# Altium PCB 175-00024_rev3, Backplane, Instrument Crate.PcbDoc (part 1 of 4)
Units mil, origin at the board's own origin, x right, y up, seen from the top; angles counter-clockwise.
Board outline 8400 x 10183.07 mil, 8 copper layers (Top Layer (*.GTL), Mid-Layer 1 (*.G1), +3.3V (*.GP1), +24V (*.GP2), RTN (*.GP3), +12V (*.GP4), Signal GND (*.GP5), Bottom Layer (*.GBL)); 240 components, 169 nets, 1580 pads, 490 vias.
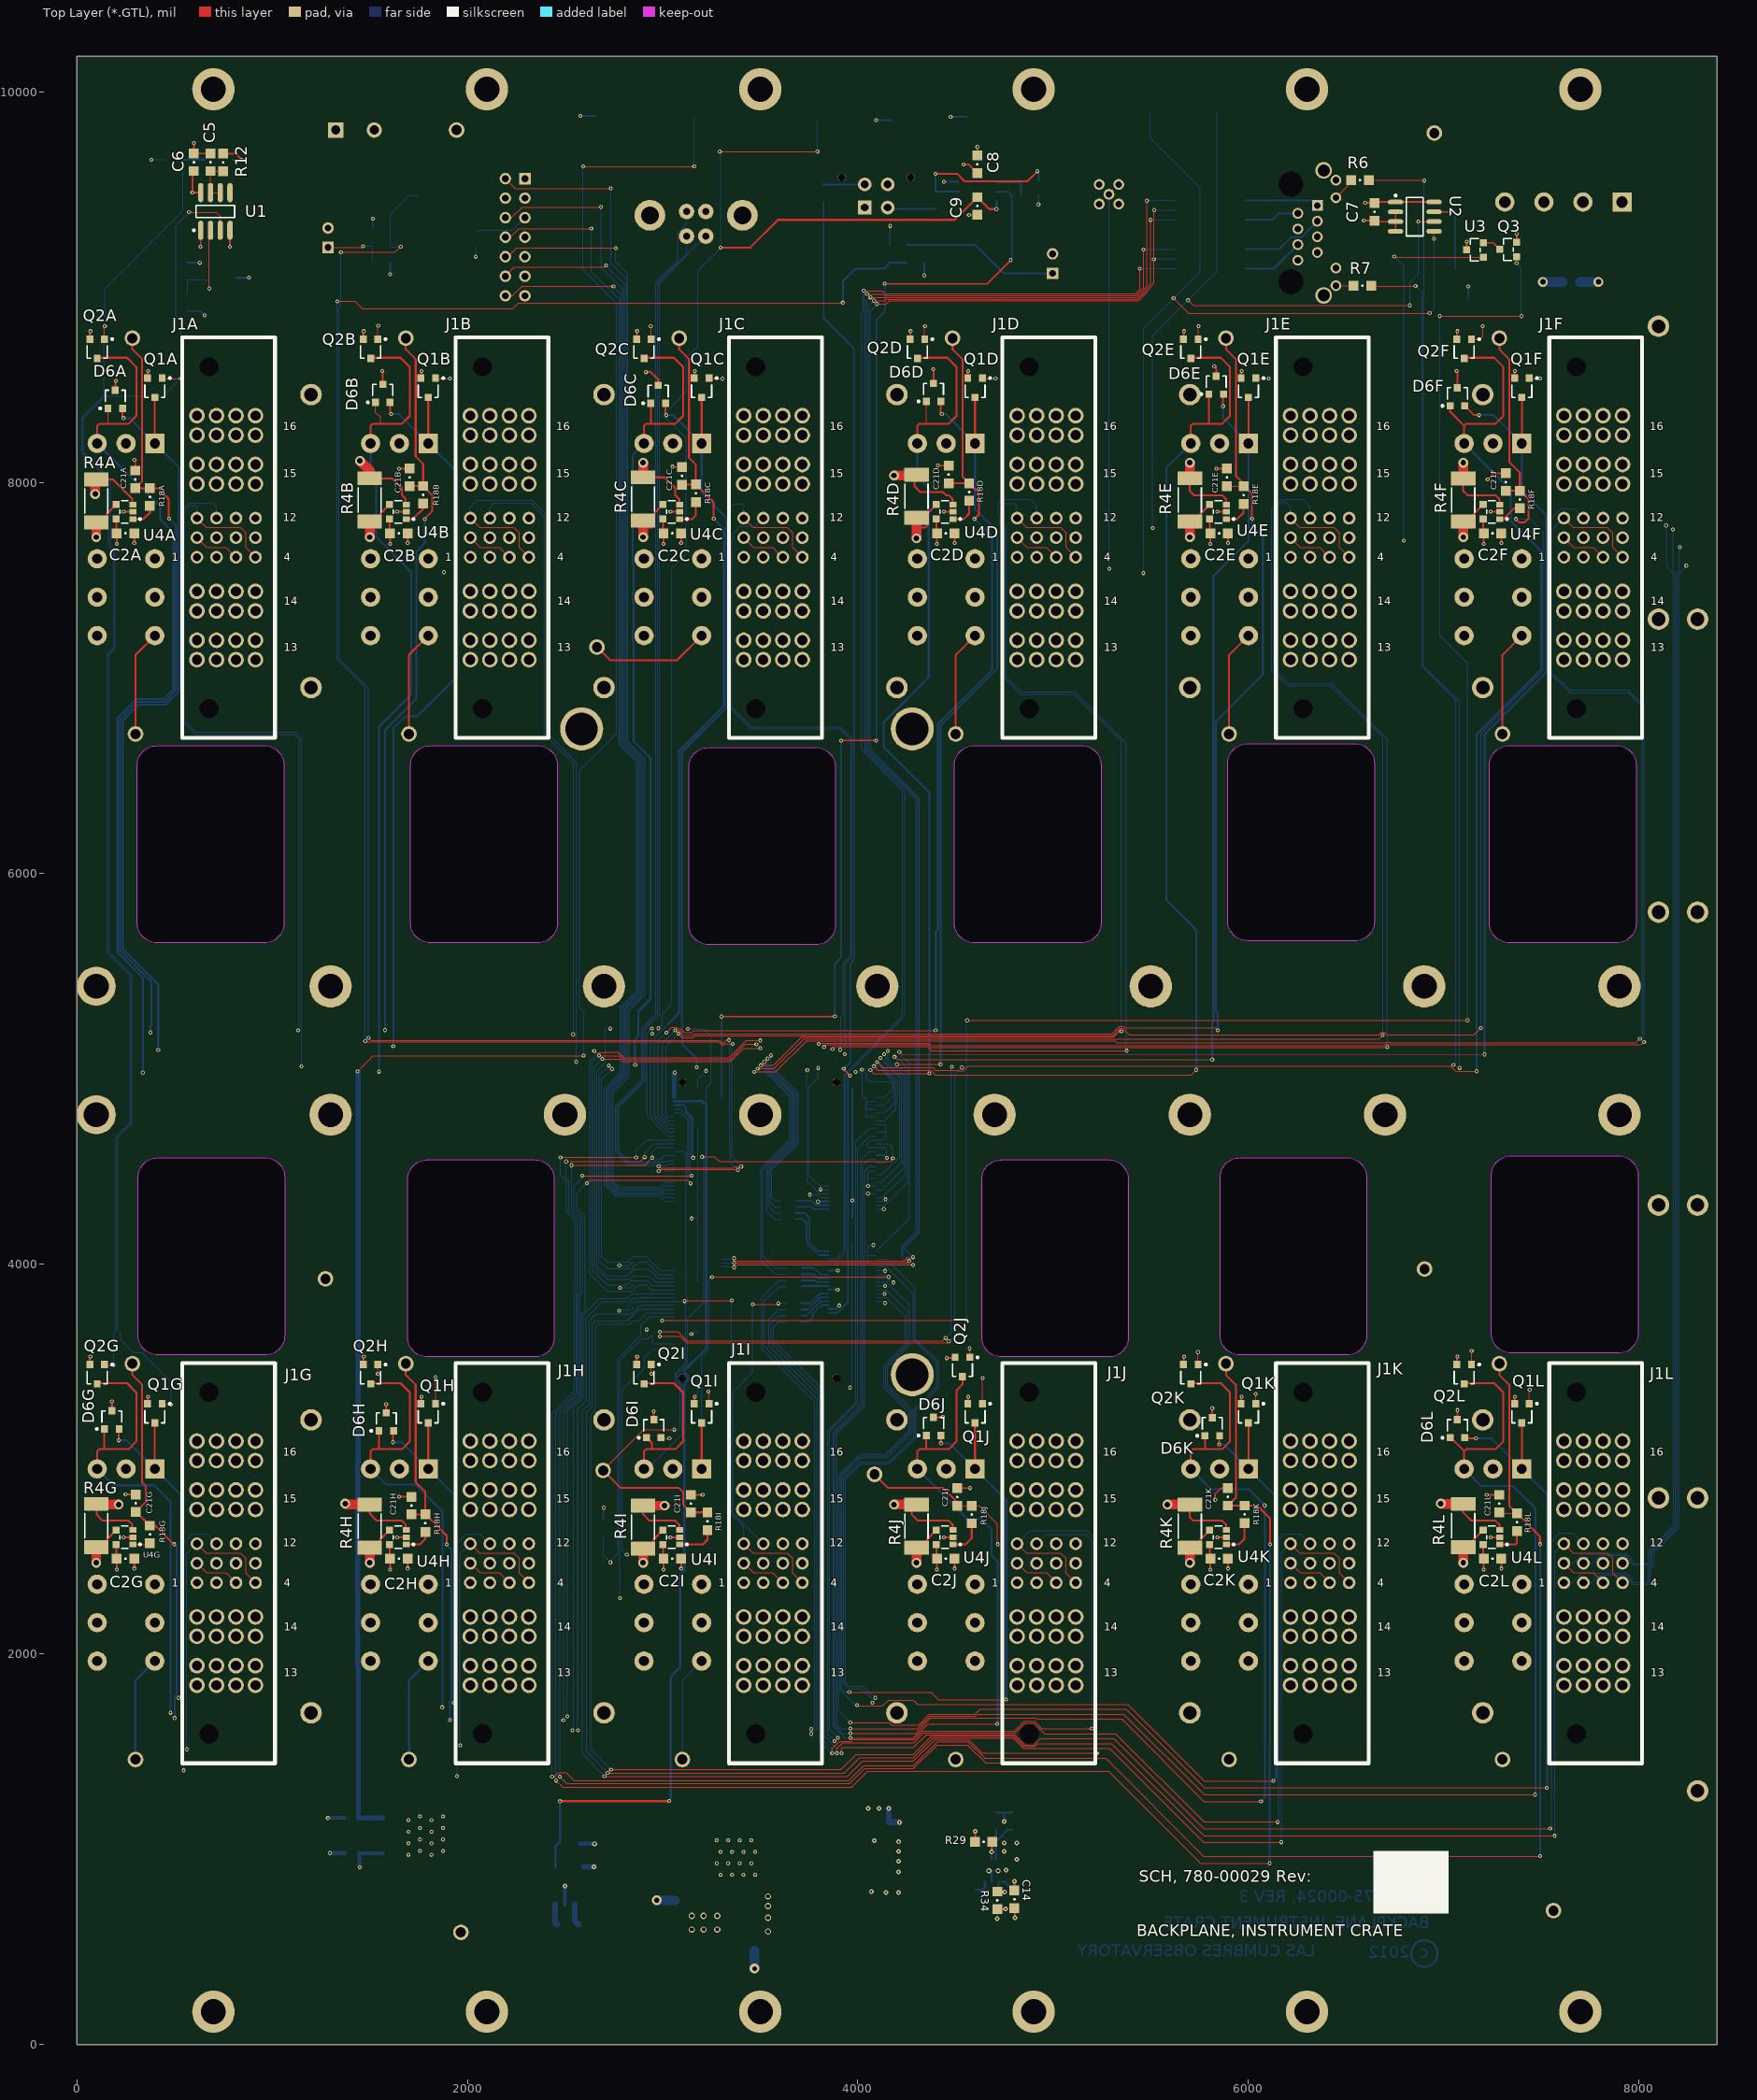
[diagram p0: Top Layer (*.GTL) view]
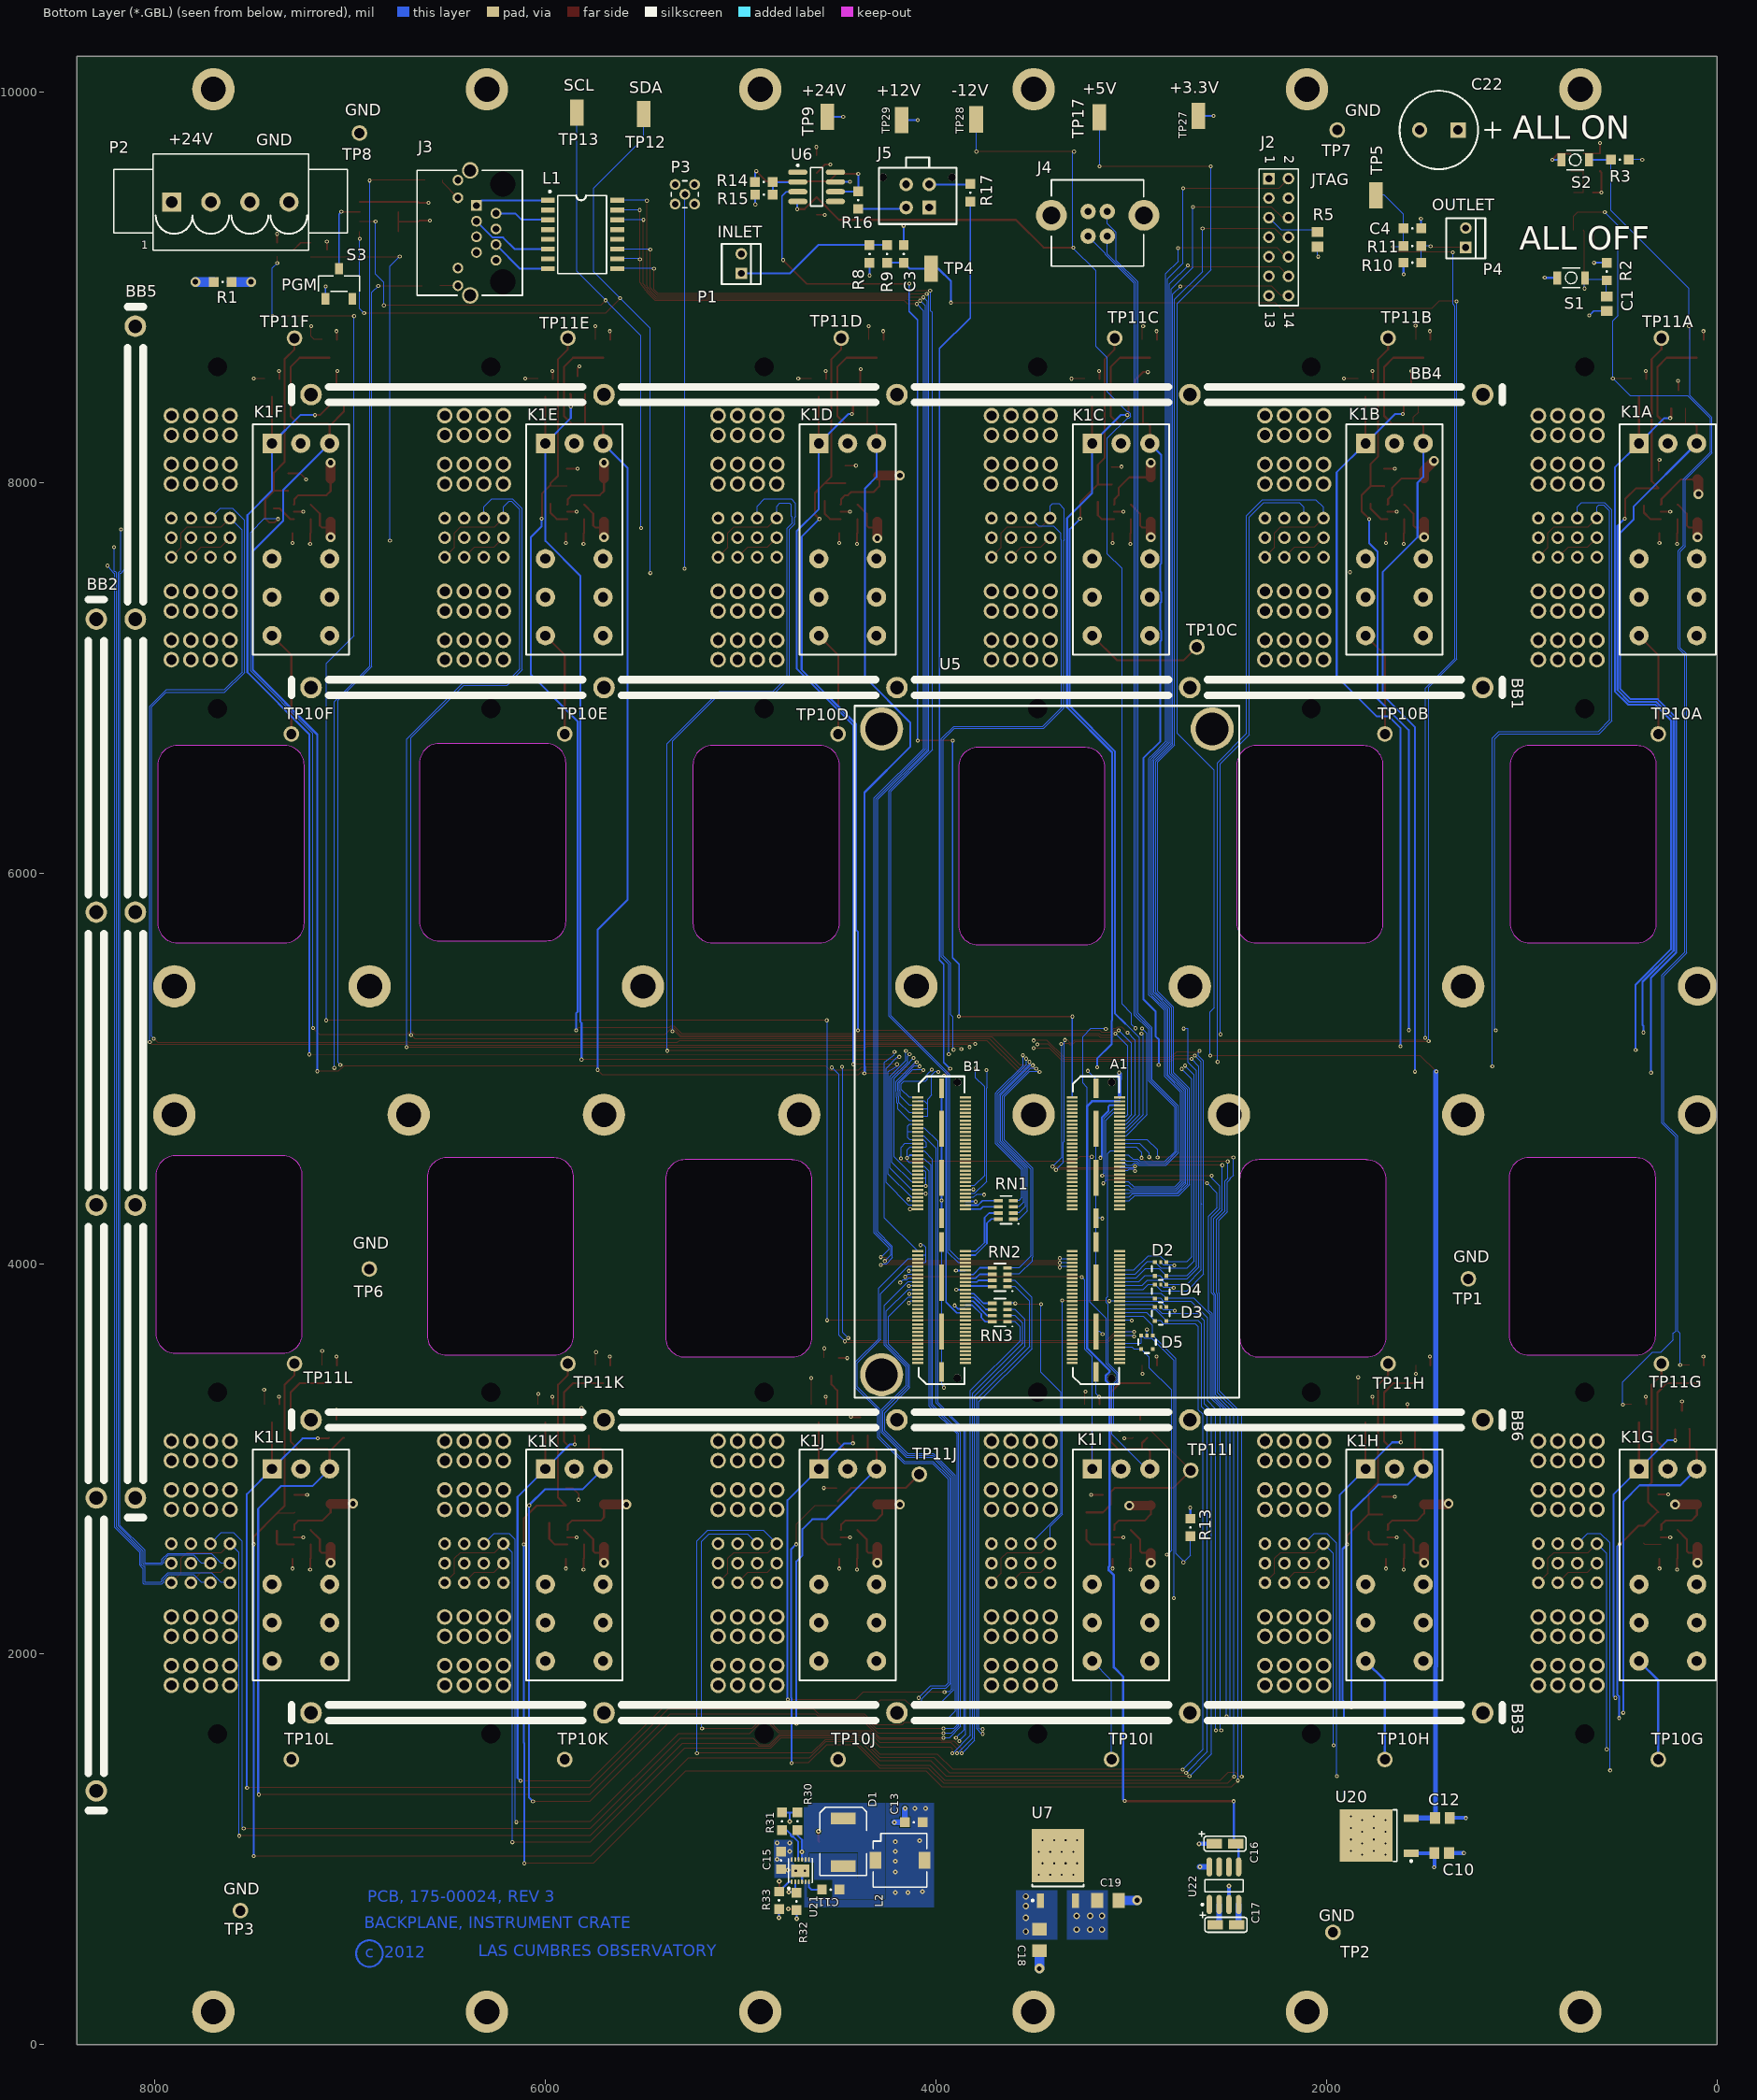
[diagram p1: Bottom Layer (*.GBL) view, seen from below]
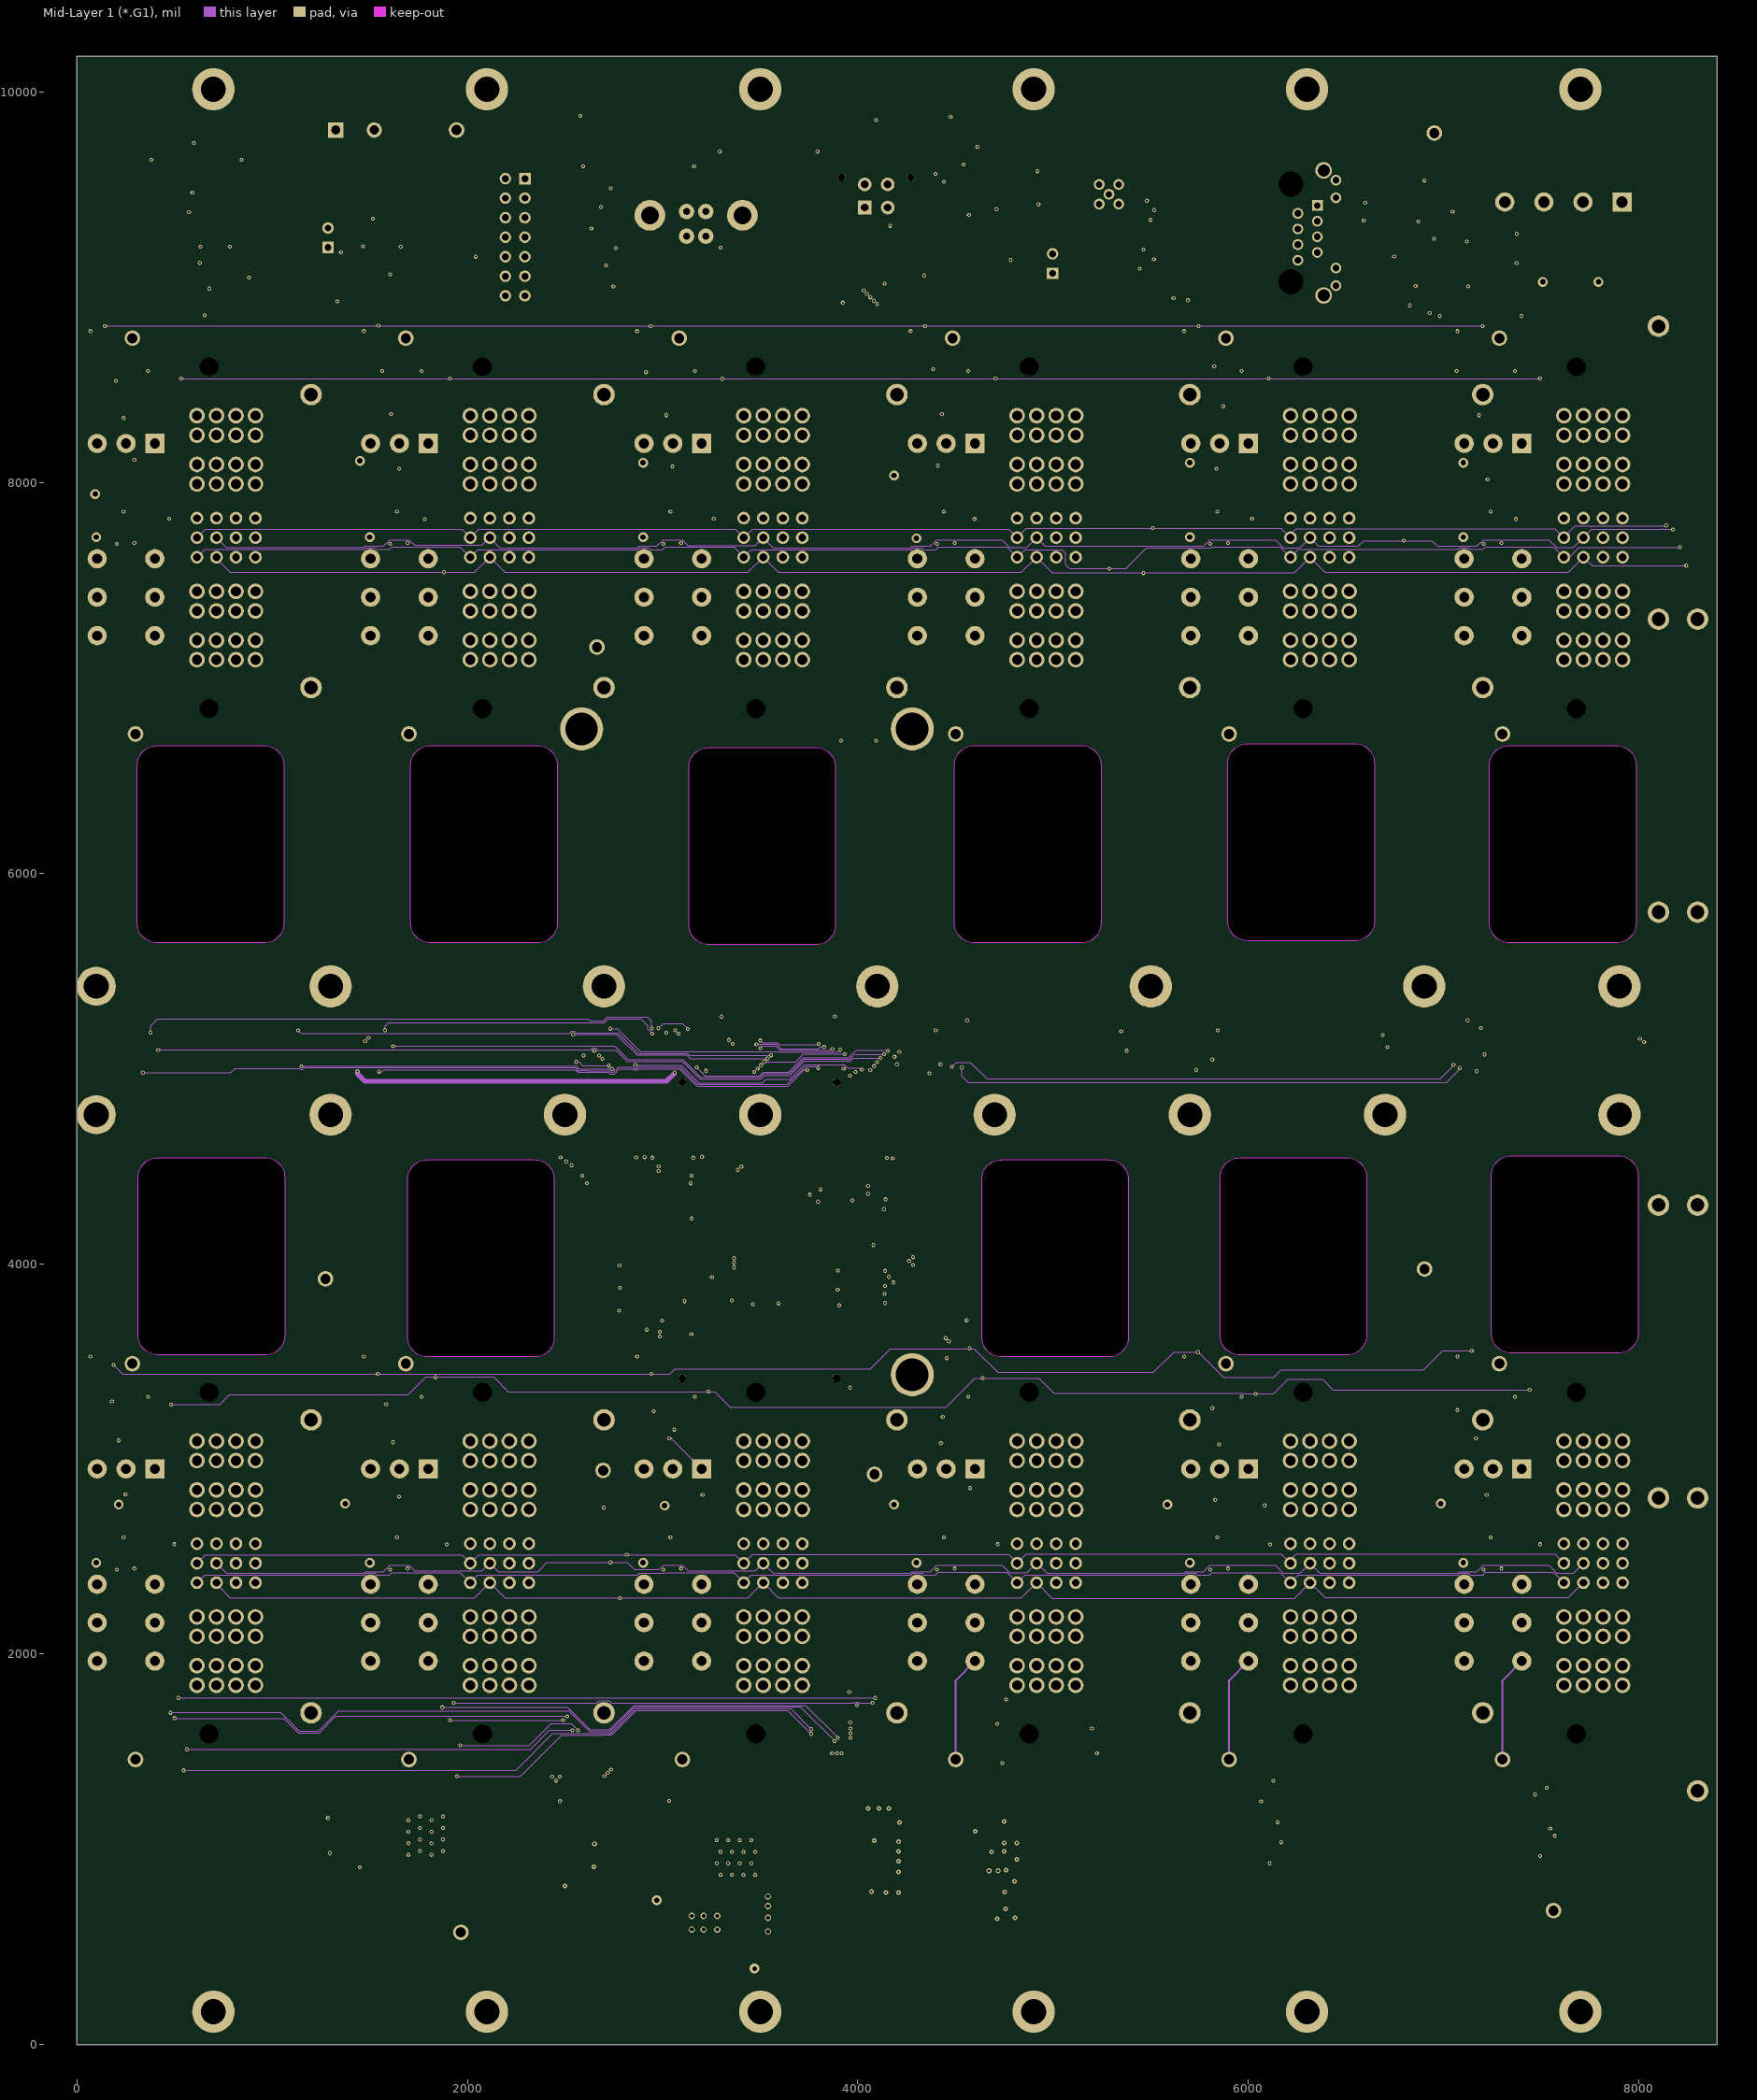
[diagram p2: Mid-Layer 1 (*.G1)]
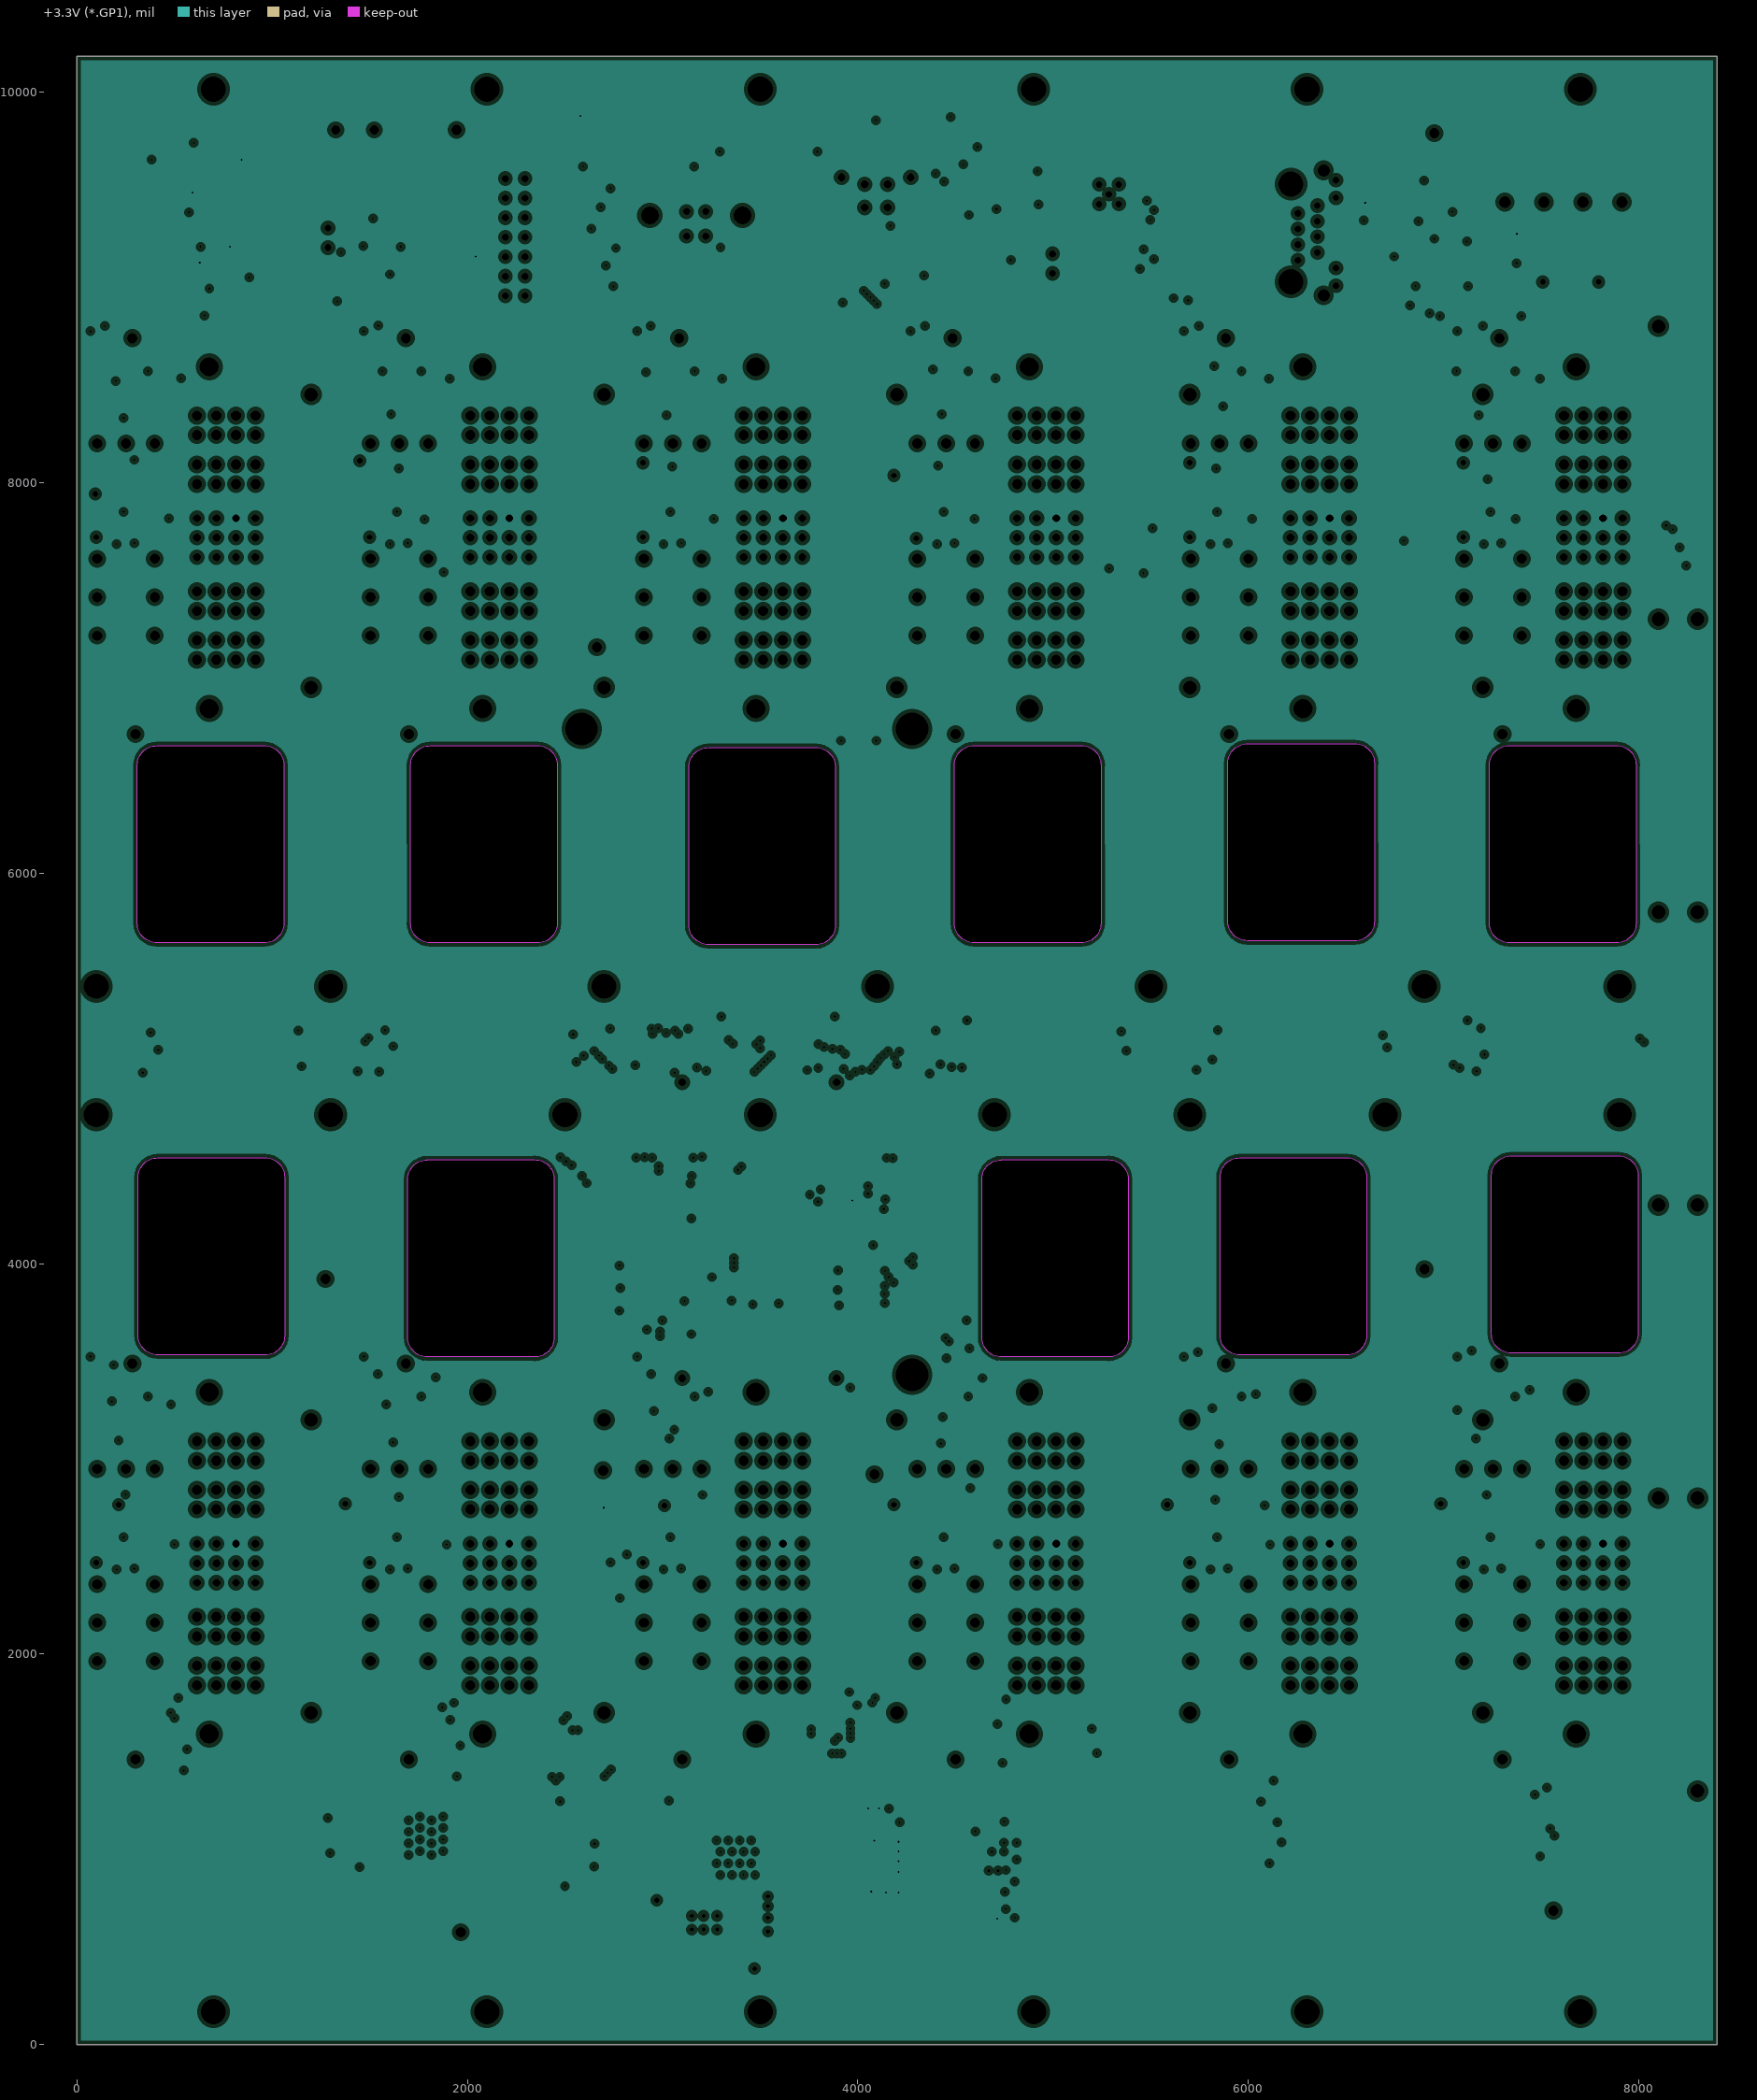
[diagram p3: +3.3V (*.GP1), clearances drawn from the general rule]
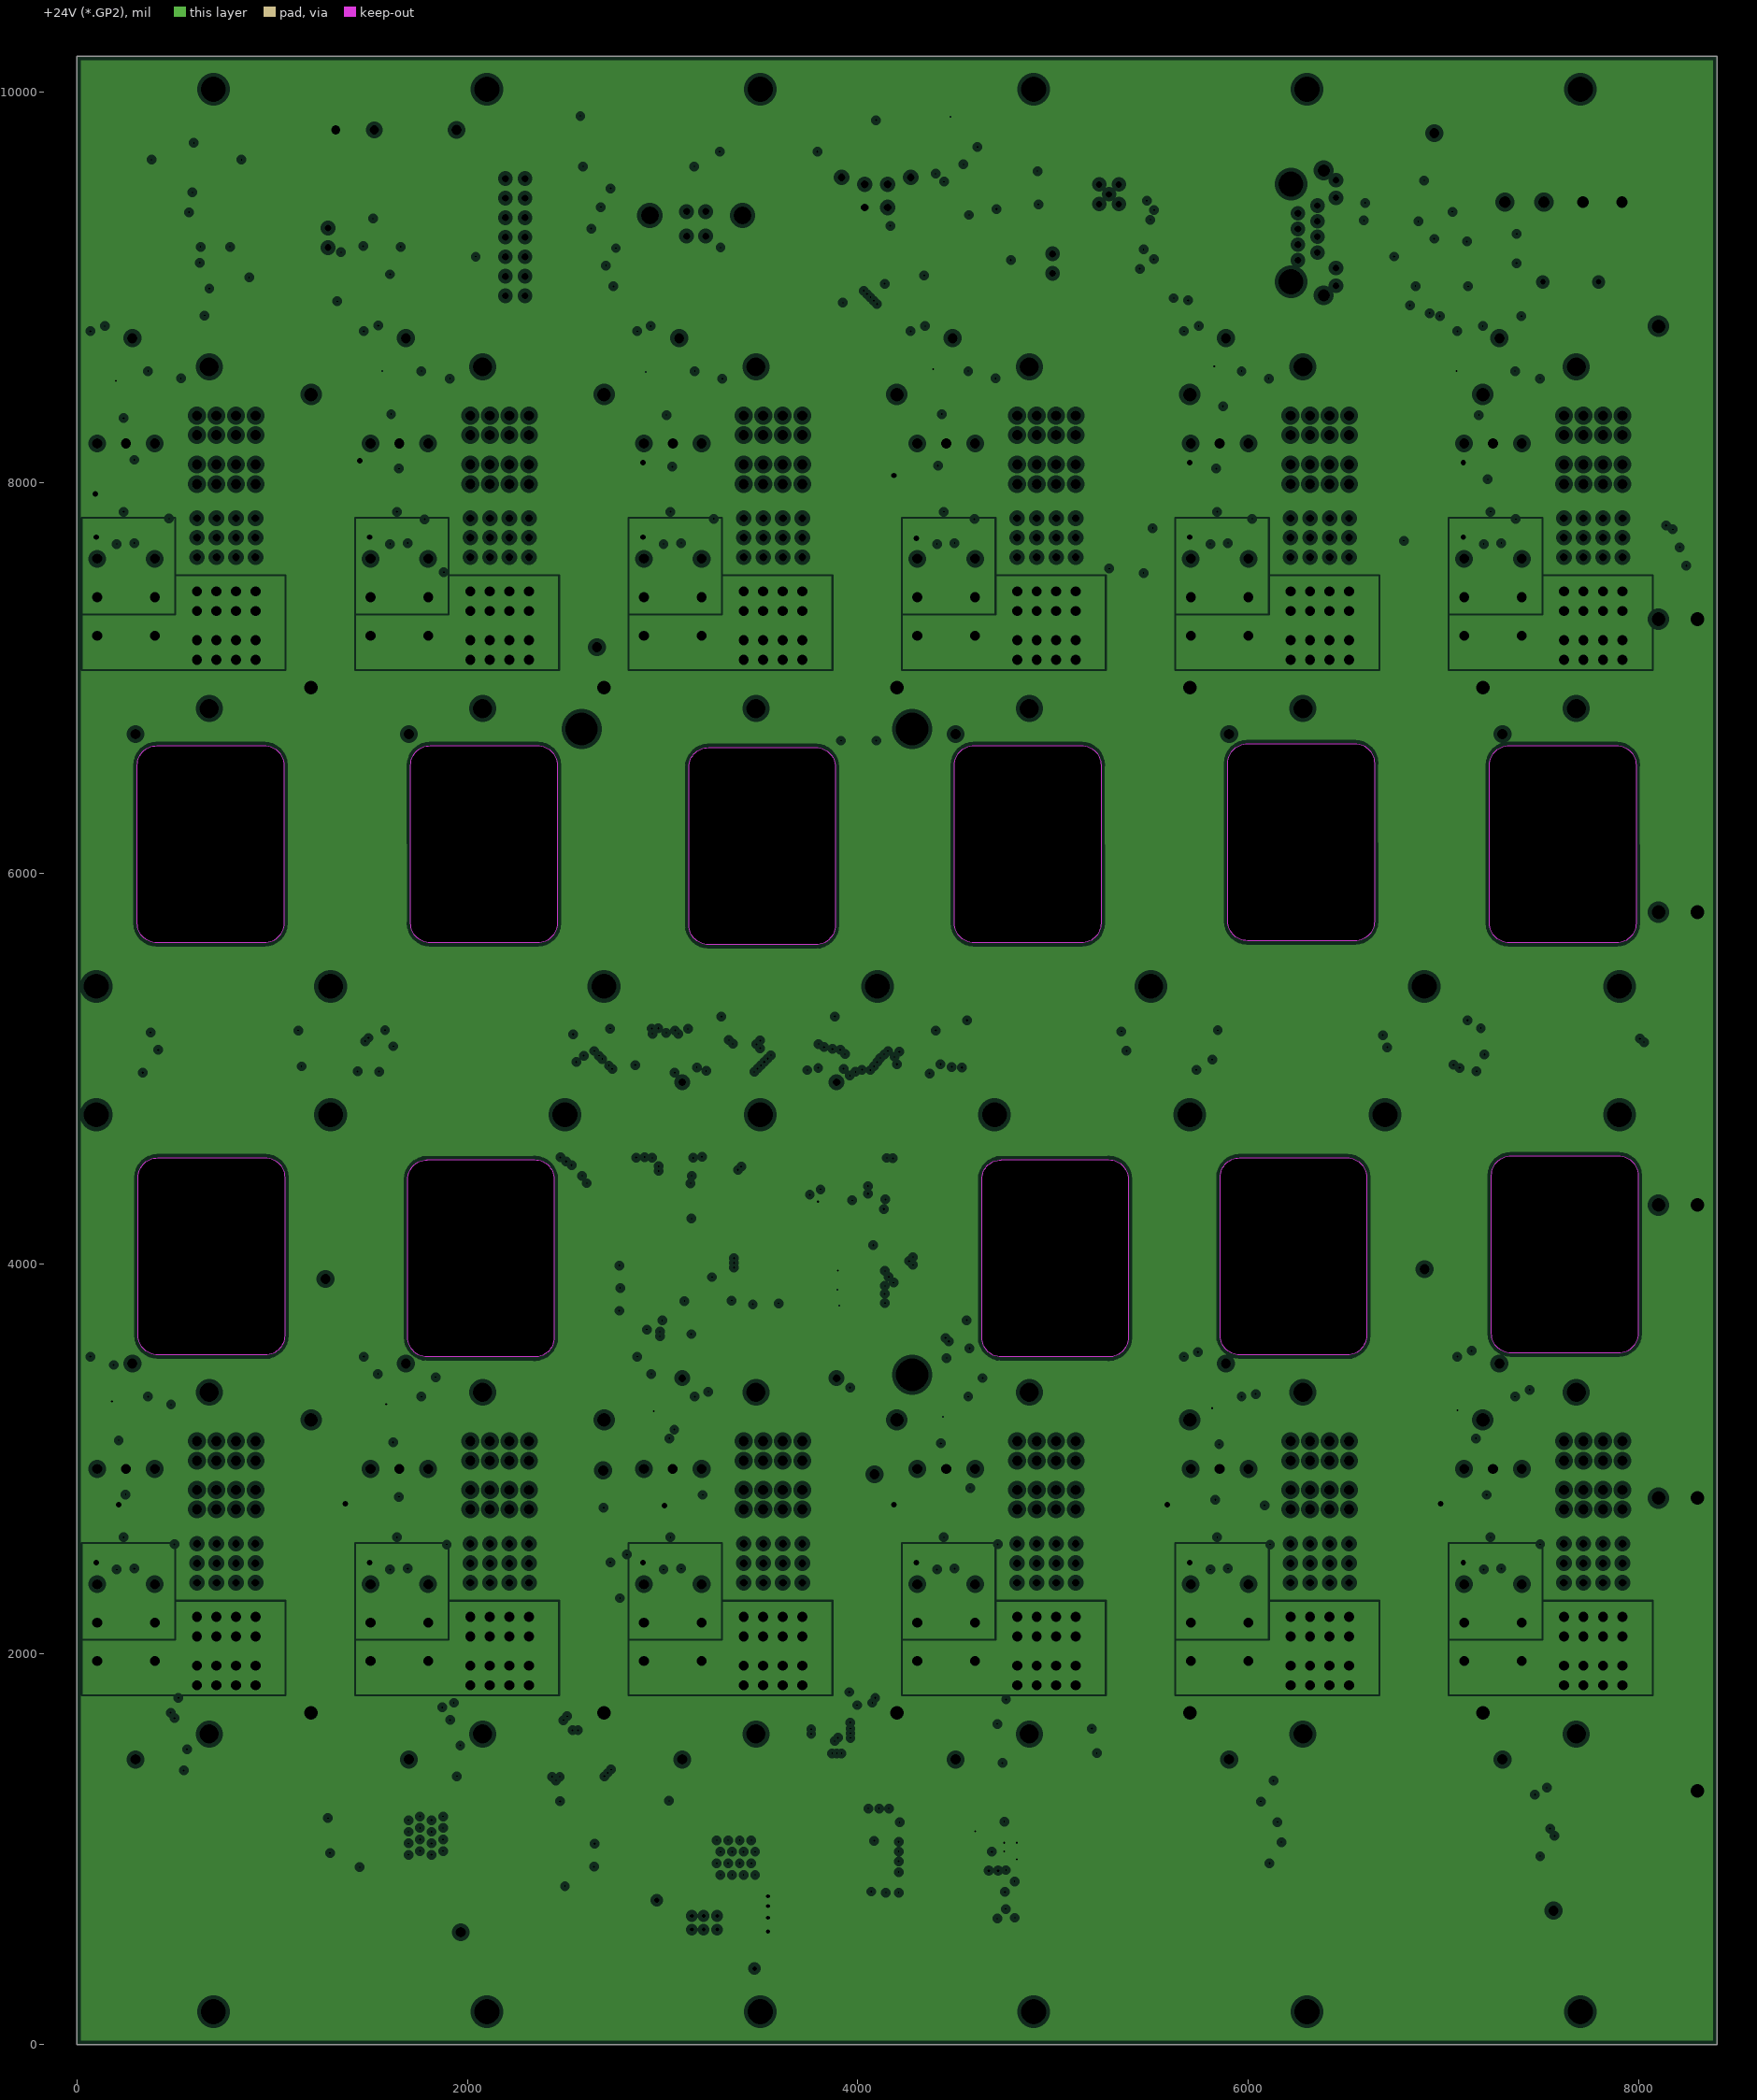
[diagram p4: +24V (*.GP2), clearances drawn from the general rule]
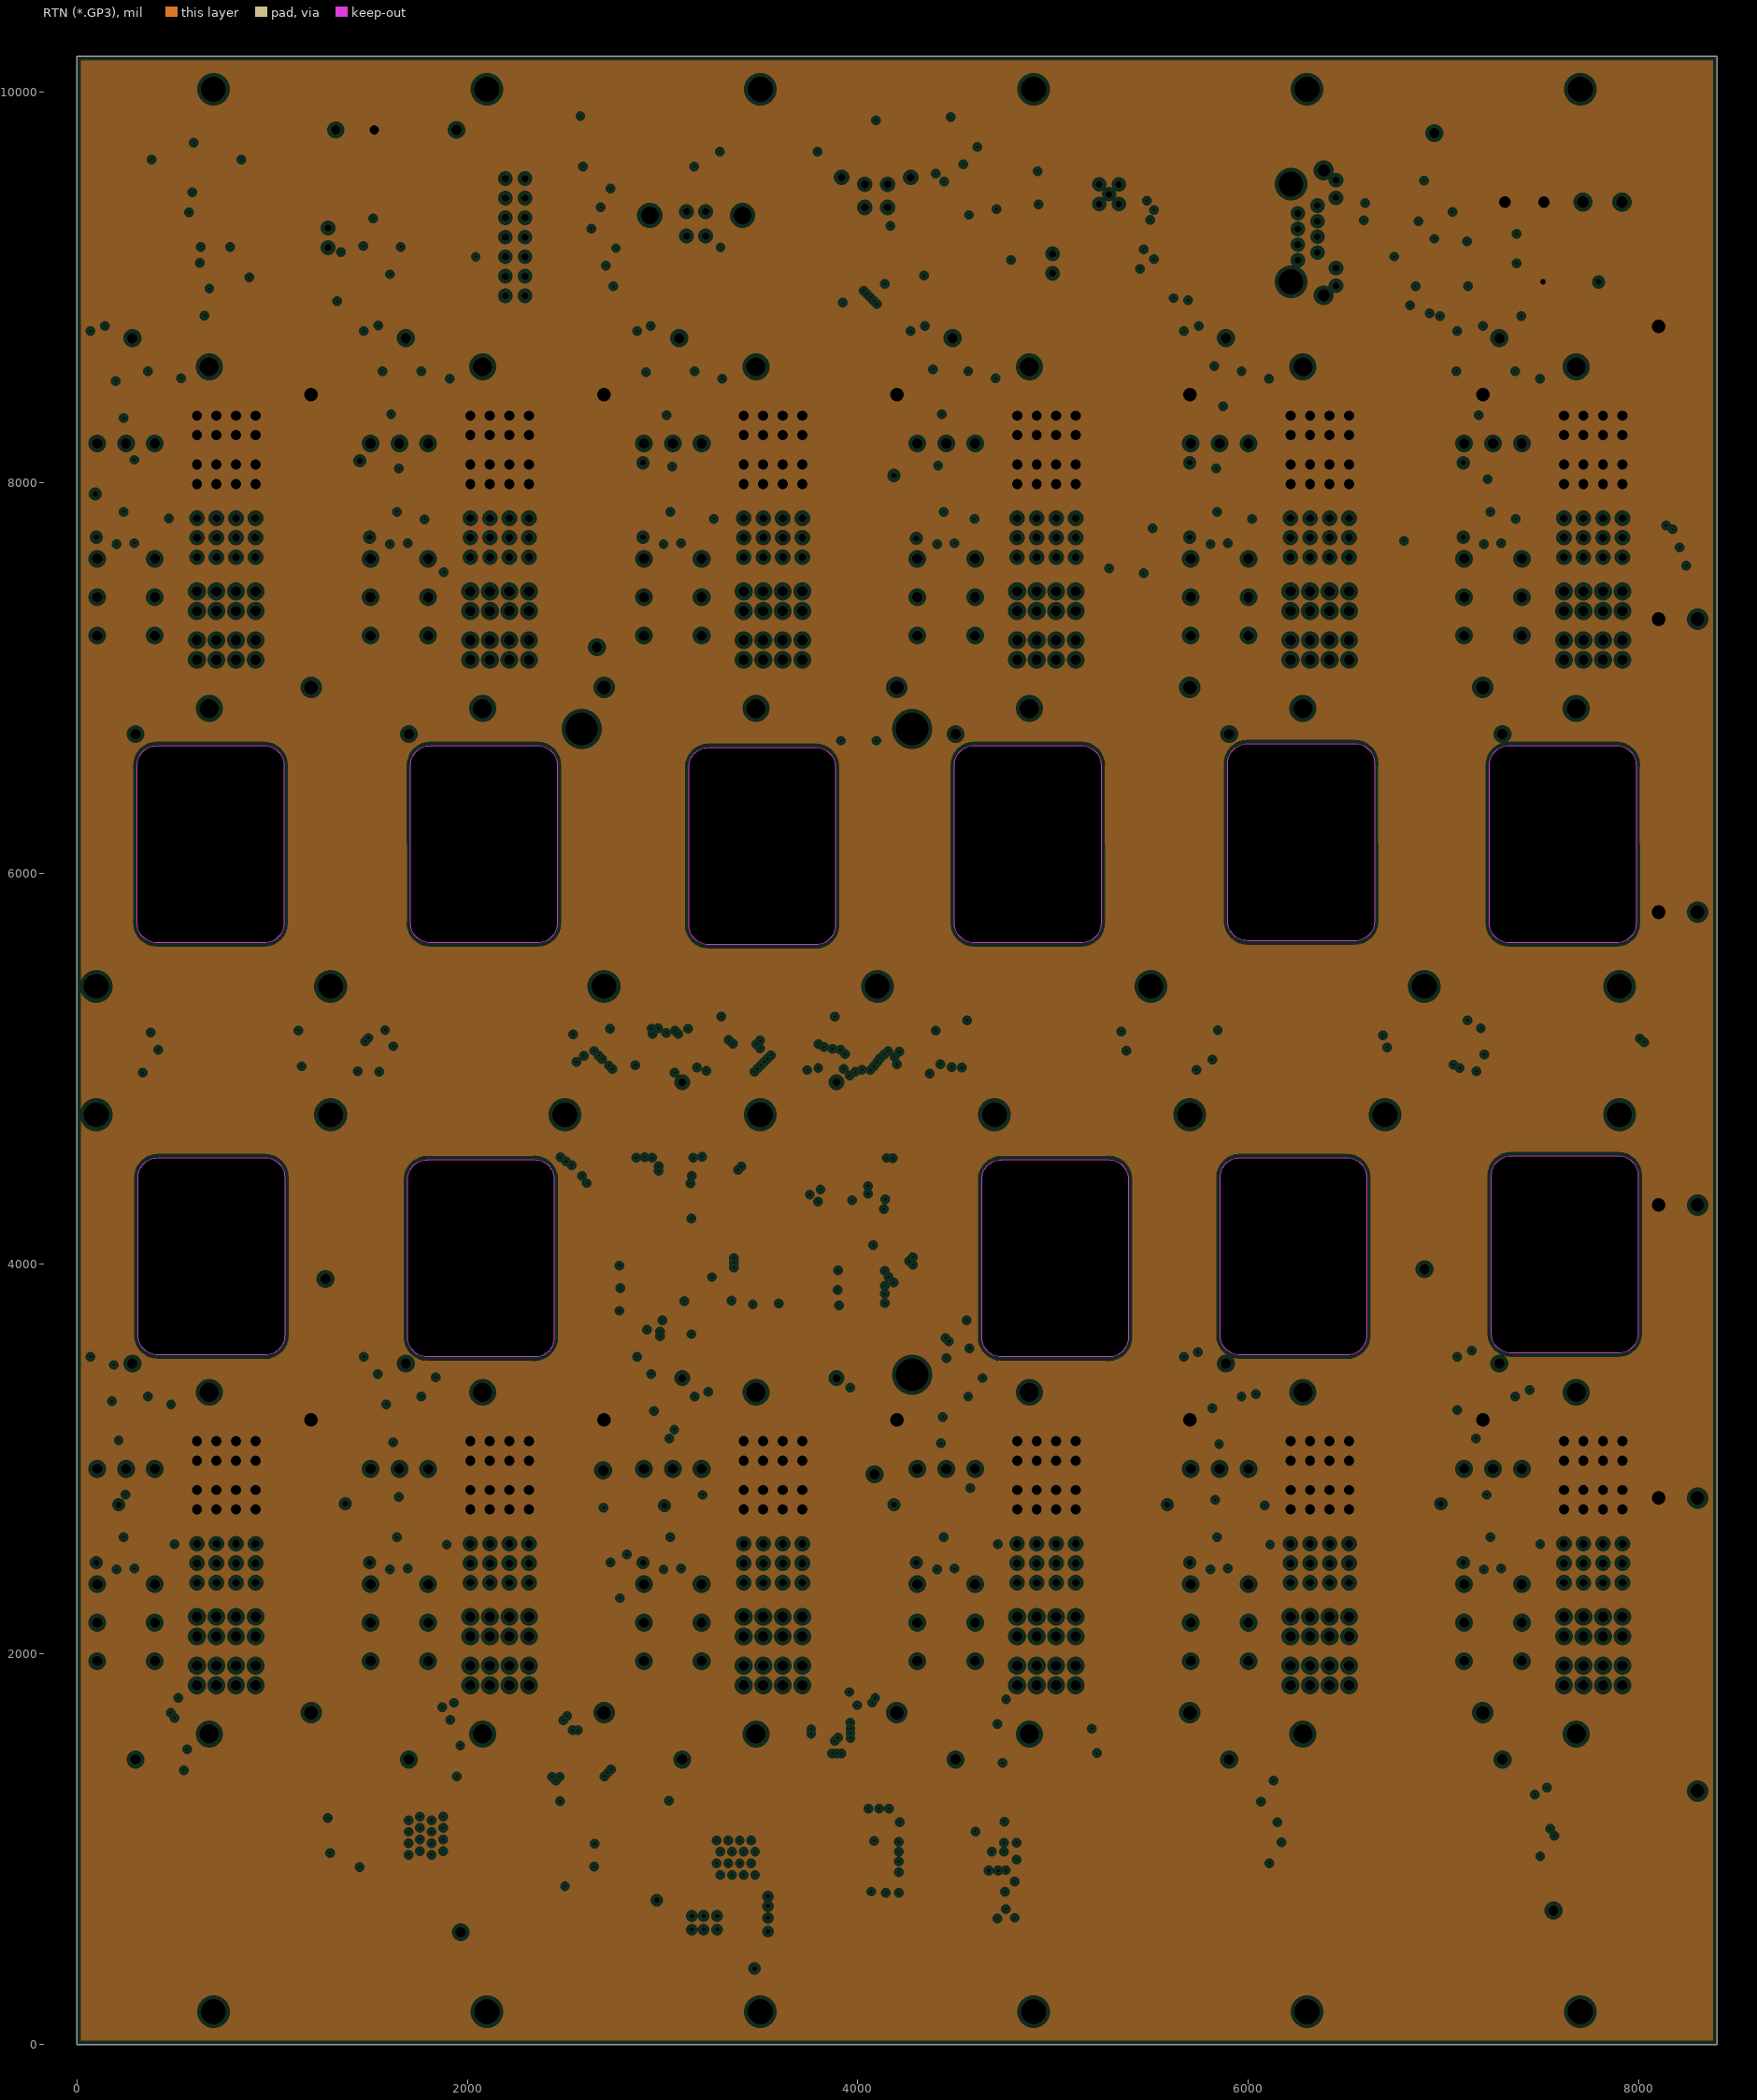
[diagram p5: RTN (*.GP3), clearances drawn from the general rule]
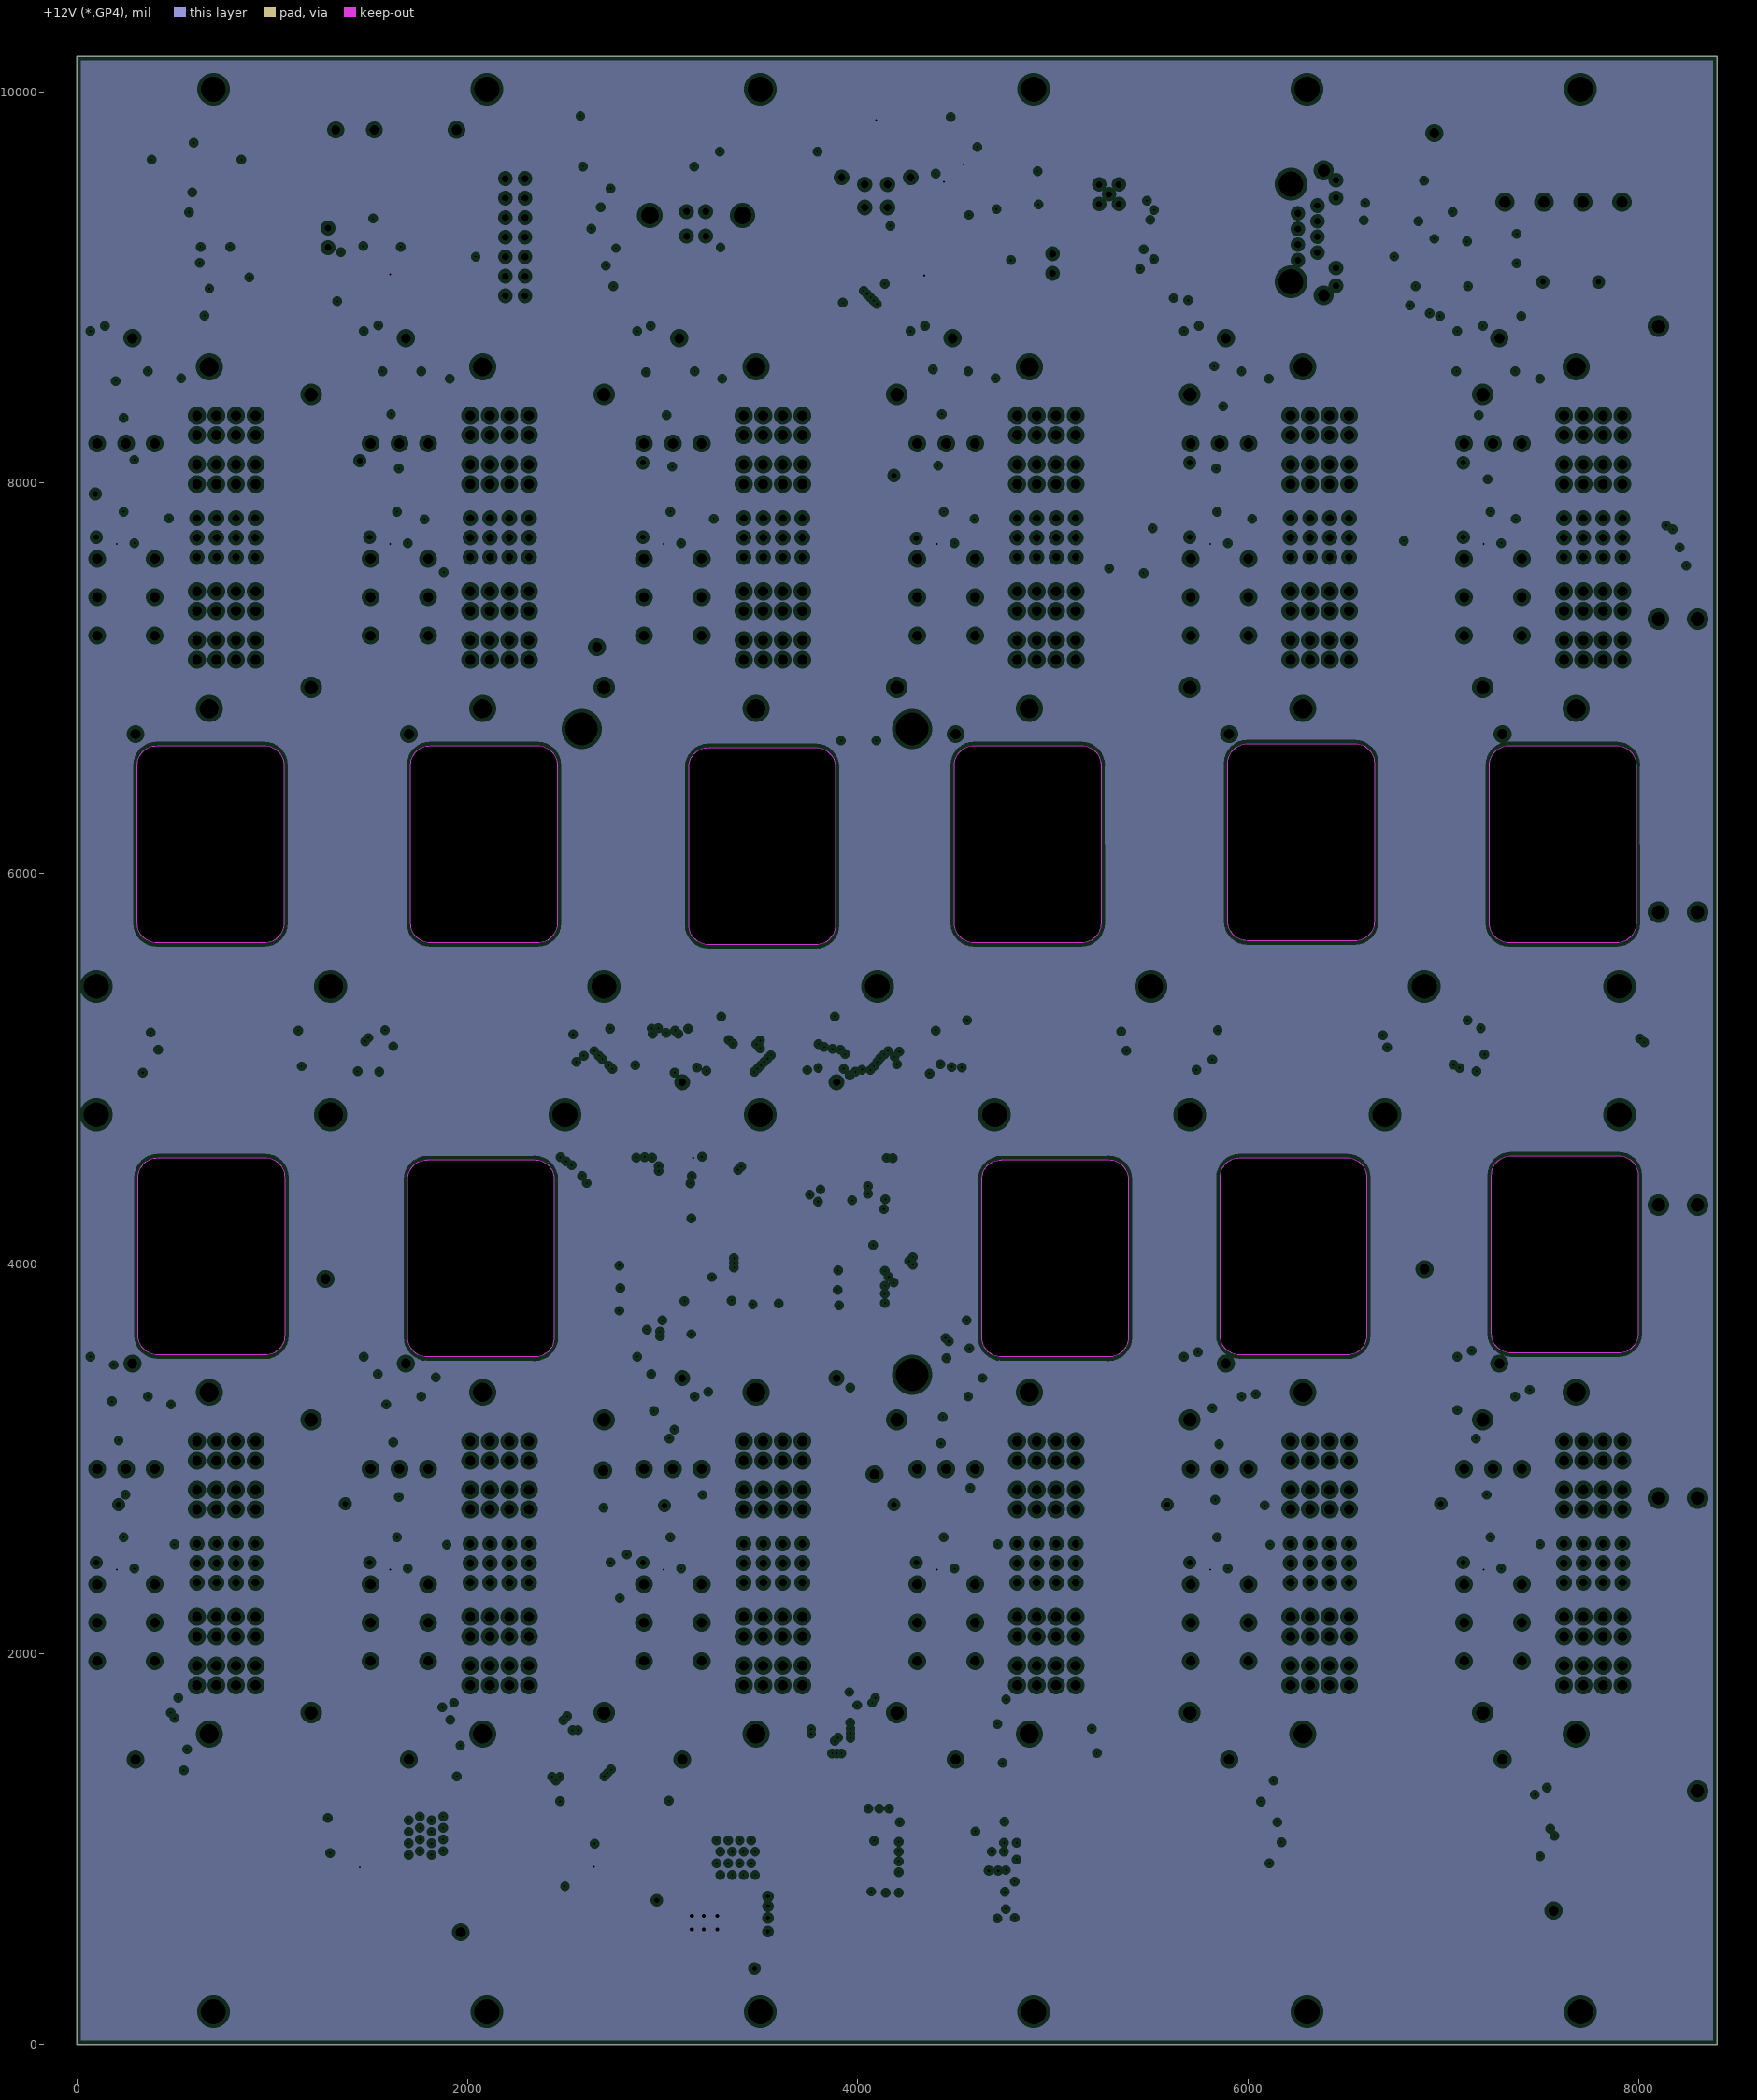
[diagram p6: +12V (*.GP4), clearances drawn from the general rule]
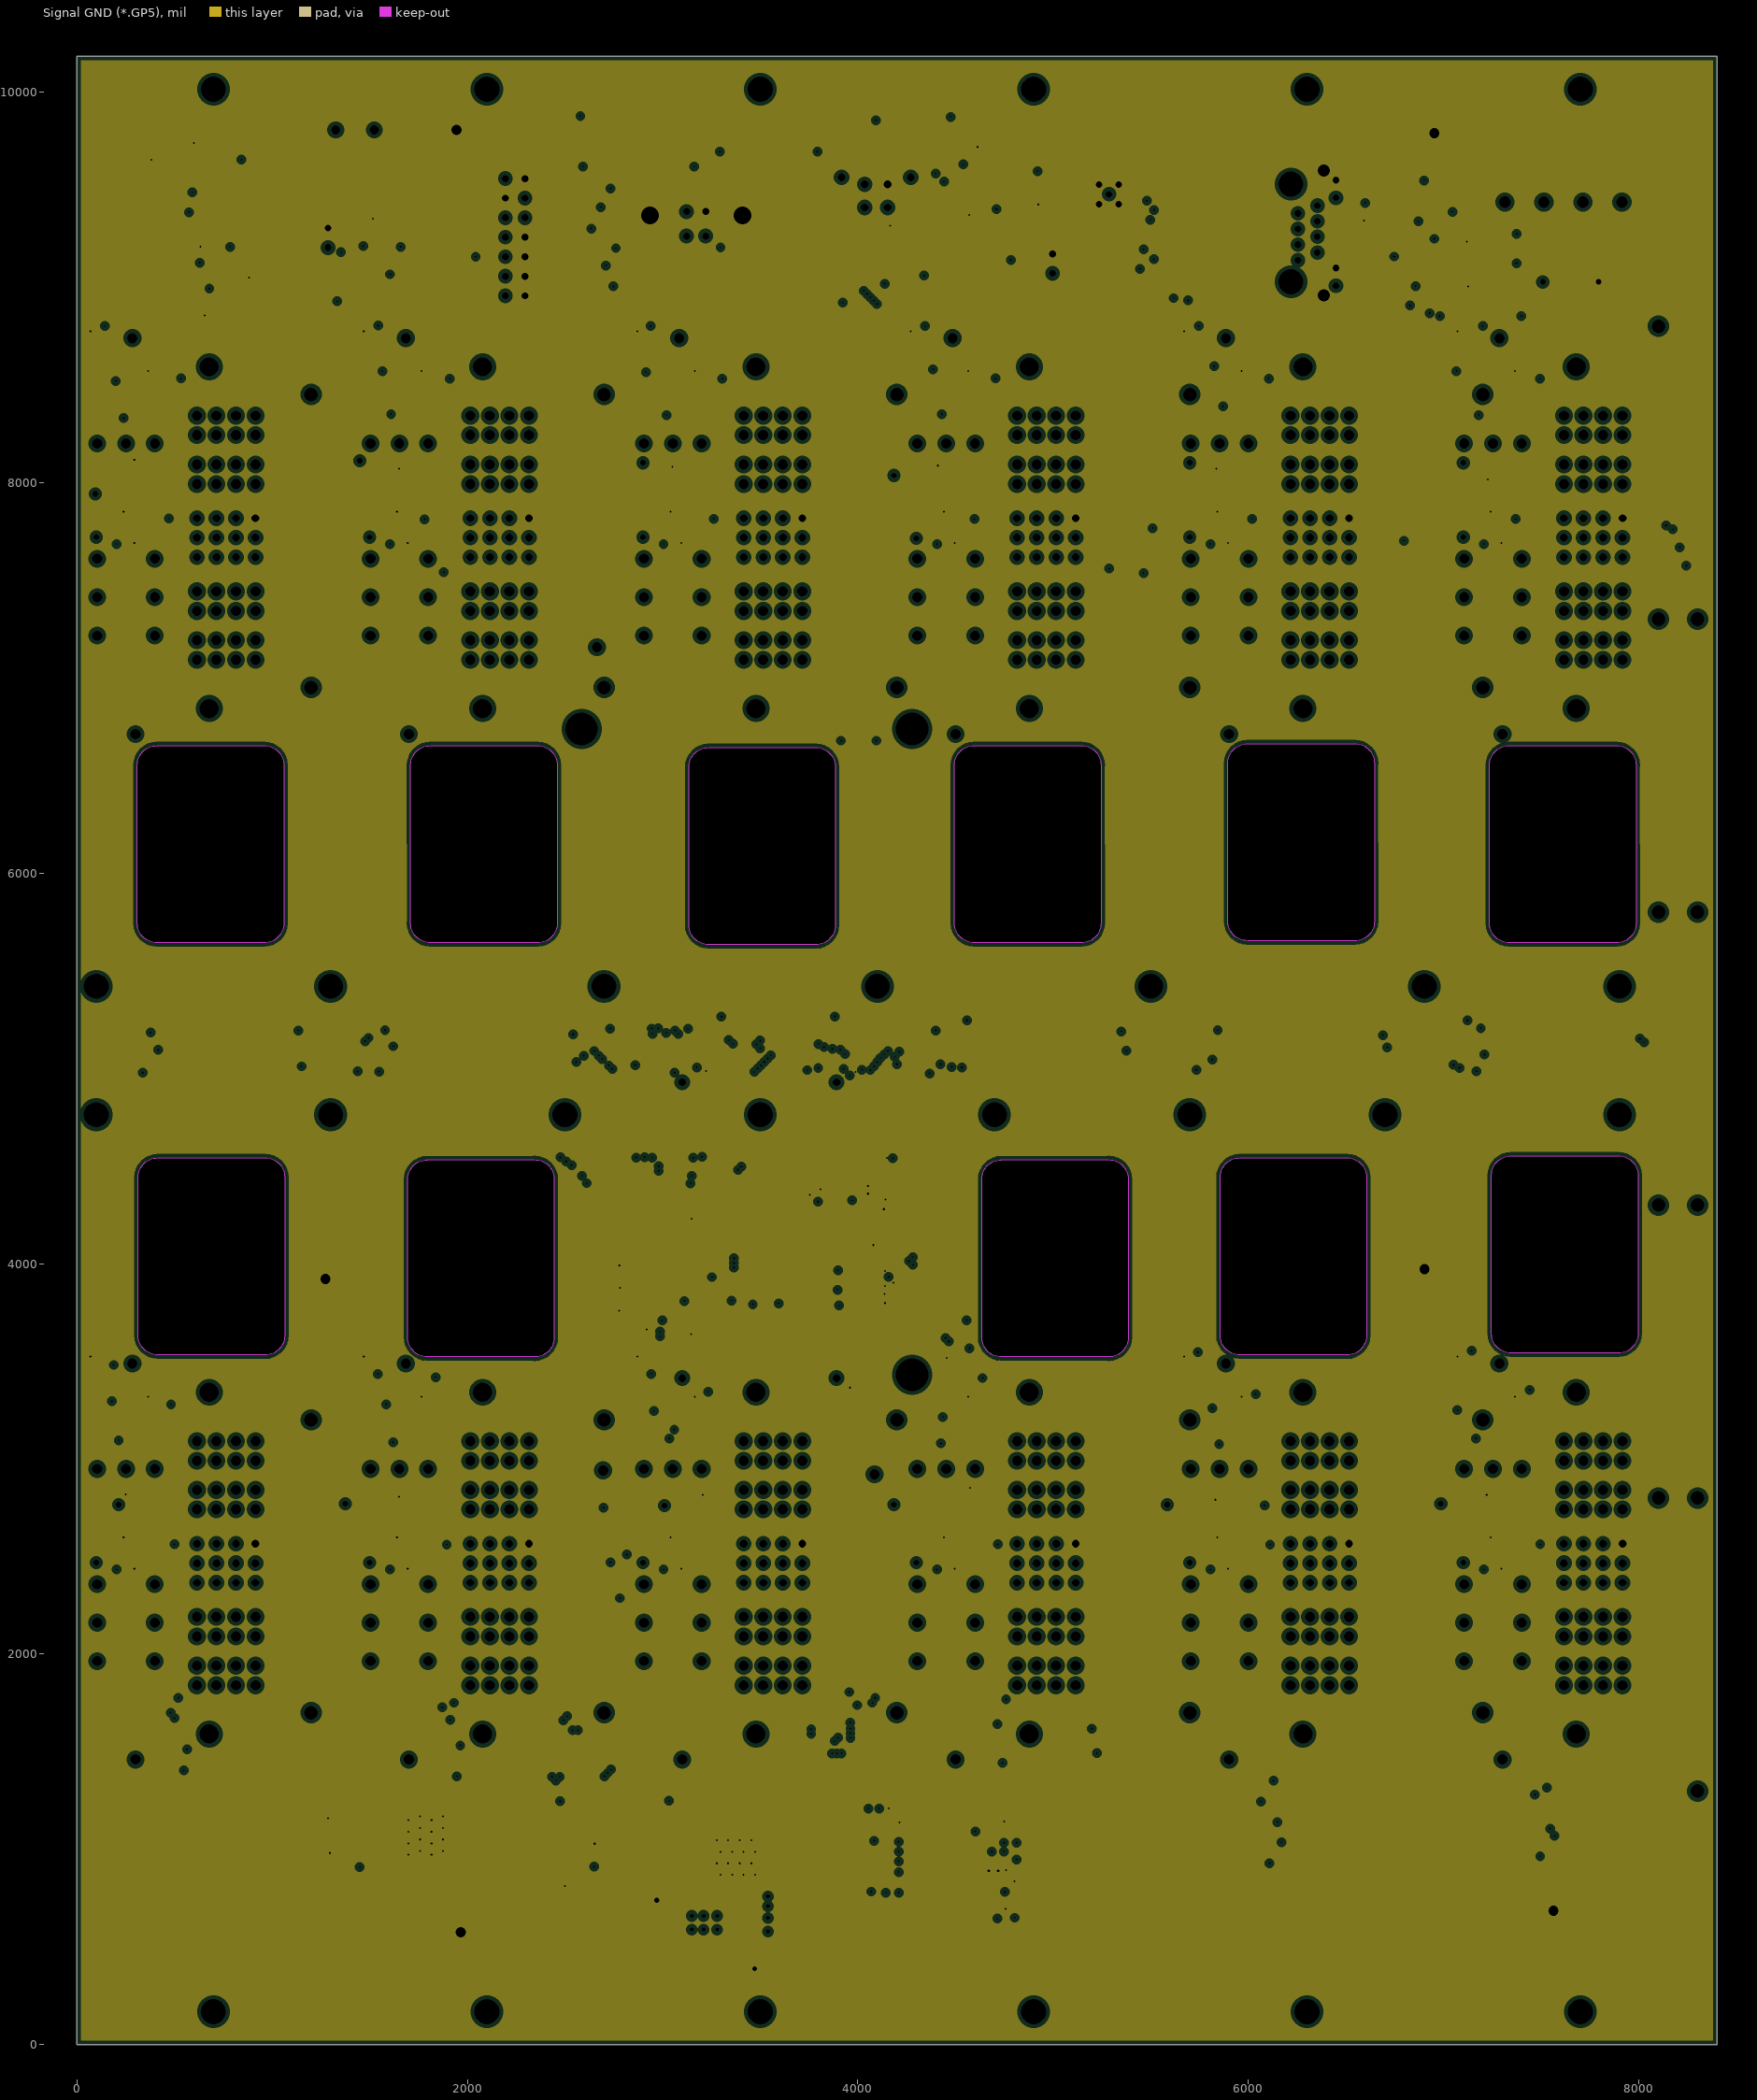
[diagram p7: Signal GND (*.GP5), clearances drawn from the general rule]

## Layer stack, top to bottom
Top Layer (*.GTL): signal copper 1.4
Dielectric: core 12.6, FR-4, Dk 4.8
Mid-Layer 1 (*.G1): signal copper 1.4
Dielectric: prepreg 12.6, FR-4, Dk 4.8
+3.3V (*.GP1): plane copper 1.4, net +3.3V
Dielectric: core 12.6, FR-4, Dk 4.8
+24V (*.GP2): plane copper 2.8, net (Multiple Nets)
Dielectric: prepreg 12.6, FR-4, Dk 4.8
RTN (*.GP3): plane copper 2.8, net RTN
Dielectric: core 12.6, FR-4, Dk 4.8
+12V (*.GP4): plane copper 1.4, net +12V
Dielectric: prepreg 12.6, FR-4, Dk 4.8
Signal GND (*.GP5): plane copper 1.4, net GND
Dielectric: core 12.6, FR-4, Dk 4.8
Bottom Layer (*.GBL): signal copper 1.4

## Board outline
0,0 8400,0 8400,10183.07 0,10183.07
cut-out: 310.24,5743.08 310.24,6552.11 cw(c410.24,6552.11) 410.24,6652.11 410.73,6652.6 960.24,6652.6 cw(c960.24,6552.6) 1060.24,6552.6 1060.24,5742.6 cw(c960.24,5742.6) 960.24,5642.6 411.21,5642.6 410.24,5643.08 cw(c410.24,5743.08)
cut-out: 7244.76,3642.36 7244.76,4451.39 cw(c7344.76,4451.39) 7344.76,4551.39 7345.24,4551.88 7894.76,4551.88 cw(c7894.76,4451.88) 7994.76,4451.88 7994.76,3641.88 cw(c7894.76,3641.88) 7894.76,3541.88 7345.72,3541.88 7344.76,3542.36 cw(c7344.76,3642.36)
cut-out: 5855.24,3632.36 5855.24,4441.39 cw(c5955.24,4441.39) 5955.24,4541.39 5955.73,4541.88 6505.24,4541.88 cw(c6505.24,4441.88) 6605.24,4441.88 6605.24,3631.88 cw(c6505.24,3631.88) 6505.24,3531.88 5956.21,3531.88 5955.24,3532.36 cw(c5955.24,3632.36)
cut-out: 4634.76,3622.36 4634.76,4431.39 cw(c4734.76,4431.39) 4734.76,4531.39 4735.24,4531.88 5284.76,4531.88 cw(c5284.76,4431.88) 5384.76,4431.88 5384.76,3621.88 cw(c5284.76,3621.88) 5284.76,3521.88 4735.72,3521.88 4734.76,3522.36 cw(c4734.76,3622.36)
cut-out: 1694.76,3622.36 1694.76,4431.39 cw(c1794.76,4431.39) 1794.76,4531.39 1795.24,4531.88 2344.76,4531.88 cw(c2344.76,4431.88) 2444.76,4431.88 2444.76,3621.88 cw(c2344.76,3621.88) 2344.76,3521.88 1795.72,3521.88 1794.76,3522.36 cw(c1794.76,3622.36)
cut-out: 314.76,3632.36 314.76,4441.39 cw(c414.76,4441.39) 414.76,4541.39 415.24,4541.88 964.76,4541.88 cw(c964.76,4441.88) 1064.76,4441.88 1064.76,3631.88 cw(c964.76,3631.88) 964.76,3531.88 415.72,3531.88 414.76,3532.36 cw(c414.76,3632.36)
cut-out: 7234.76,5743.32 7234.76,6552.36 cw(c7334.76,6552.36) 7334.76,6652.36 7335.24,6652.84 7884.76,6652.84 cw(c7884.76,6552.84) 7984.76,6552.84 7984.76,5742.84 cw(c7884.76,5742.84) 7884.76,5642.84 7335.72,5642.84 7334.76,5643.32 cw(c7334.76,5743.32)
cut-out: 5894.76,5753.32 5894.76,6562.36 cw(c5994.76,6562.36) 5994.76,6662.36 5995.24,6662.84 6544.76,6662.84 cw(c6544.76,6562.84) 6644.76,6562.84 6644.76,5752.84 cw(c6544.76,5752.84) 6544.76,5652.84 5995.72,5652.84 5994.76,5653.32 cw(c5994.76,5753.32)
cut-out: 4494.76,5743.32 4494.76,6552.36 cw(c4594.76,6552.36) 4594.76,6652.36 4595.24,6652.84 5144.76,6652.84 cw(c5144.76,6552.84) 5244.76,6552.84 5244.76,5742.84 cw(c5144.76,5742.84) 5144.76,5642.84 4595.72,5642.84 4594.76,5643.32 cw(c4594.76,5743.32)
cut-out: 3134.76,5733.32 3134.76,6542.36 cw(c3234.76,6542.36) 3234.76,6642.36 3235.24,6642.84 3784.76,6642.84 cw(c3784.76,6542.84) 3884.76,6542.84 3884.76,5732.84 cw(c3784.76,5732.84) 3784.76,5632.84 3235.72,5632.84 3234.76,5633.32 cw(c3234.76,5733.32)
cut-out: 1710.24,5743.08 1710.24,6552.11 cw(c1810.24,6552.11) 1810.24,6652.11 1810.73,6652.6 2360.24,6652.6 cw(c2360.24,6552.6) 2460.24,6552.6 2460.24,5742.6 cw(c2360.24,5742.6) 2360.24,5642.6 1811.21,5642.6 1810.24,5643.08 cw(c1810.24,5743.08)

## Design rules (kind name [scope] priority, off if disabled: settings)
Clearance Clearance_1 [(OnLayer('+24V (*.GP1)'))] p1: gap=10
Clearance [All] p2: gap=4
ComponentClearance "Clearance SF Module" [InComponent('U5')] p1: gap=0 collisioncheckmode=3 verticalgap=-700 showdistances=FALSE
ComponentClearance "Clearance Backplane Header" [HasFootprint('PESC-02-12-02-01-S-VT-LC')] p2: gap=-10 collisioncheckmode=3 verticalgap=-700 showdistances=FALSE
ComponentClearance [All] p3: gap=5 collisioncheckmode=3 verticalgap=10 showdistances=FALSE
HoleSize [All] p1: absolutevalues=TRUE maxlimit=300 minlimit=1 maxpercent=80.000 minpercent=20.000
MinimumSolderMaskSliver [All] p1: minsoldermaskwidth=1
PlaneClearance [All] p1: clearance=20
PlaneConnect "High Current" [(InNet('NetJ1A_13')OR InNet('NetJ1B_13')OR InNet('NetJ1C_13')OR InNet('NetJ1D_13')OR InNet('NetJ1E_13')OR InNet('NetJ1F_13')OR InNet('NetJ1G_13')OR InNet('NetJ1H_13')OR InNet('NetJ1I_13')OR InNet('NetJ1J_13')OR InNet('NetJ1K_13')OR InNet('NetJ1L_13') OR InNet('NetK1A_11')OR InNet('NetK1B_11')OR InNet('NetK1C_11')OR InNet('NetK1D_11')OR InNet('NetK1E_11')OR InNet('NetK1F_11')OR InNet('NetK1G_11')OR InNet('NetK1H_11')OR InNet('NetK1I_11')OR InNet('NetK1J_11')OR InNet('NetK1K_11')OR InNet('NetK1L_11')or InNet('+24V')or InNet('RTN'))] p1: planeconnectstyle=Relief reliefexpansion=20 reliefentries=4 reliefconductorwidth=30 reliefairgap=10
PlaneConnect [All] p2: planeconnectstyle=Relief reliefexpansion=20 reliefentries=4 reliefconductorwidth=10 reliefairgap=10
PolygonConnect [All] p1: connectstyle=Direct reliefconductorwidth=10 reliefentries=4 polygonreliefangle="90 Angle"
RoomDefinition "780-00029,rev3,Pg3,Backplane, Instrument Crate" [InComponentClass('780-00029,rev3,Pg3,Backplane, Instrument Crate')] p1: confinementstyle=ConfineIn formatcopy=TRUE lockcomponents=FALSE outline 419,2570 6667,2570 6667,9971 419,9971
RoomDefinition "Power Supplies" [InComponentClass('Power Supplies')] p2: confinementstyle=ConfineIn formatcopy=TRUE lockcomponents=FALSE outline -905,-487.4 11520,-487.4 11520,10690 -905,10690
RoomDefinition BackplaneSlot12 [InComponentClass('BackplaneSlot12')] p3: confinementstyle=ConfineIn formatcopy=TRUE lockcomponents=FALSE outline 6969.99,1388.82 8169.99,1388.82 8169.99,3538.82 6969.99,3538.82
RoomDefinition BackplaneSlot11 [InComponentClass('BackplaneSlot11')] p4: confinementstyle=ConfineIn formatcopy=TRUE lockcomponents=FALSE outline 5569.99,1388.82 6769.99,1388.82 6769.99,3538.82 5569.99,3538.82
RoomDefinition BackplaneSlot10 [InComponentClass('BackplaneSlot10')] p5: confinementstyle=ConfineIn formatcopy=TRUE lockcomponents=FALSE outline 4018.5,1388.82 5371.5,1388.82 5371.5,3603.14 4018.5,3603.14
RoomDefinition BackplaneSlot9 [InComponentClass('BackplaneSlot9')] p6: confinementstyle=ConfineIn formatcopy=TRUE lockcomponents=FALSE outline 2626.5,1388.82 3969.99,1388.82 3969.99,3538.82 2626.5,3538.82
RoomDefinition BackplaneSlot8 [InComponentClass('BackplaneSlot8')] p7: confinementstyle=ConfineIn formatcopy=TRUE lockcomponents=FALSE outline 1369.99,1388.82 2569.99,1388.82 2569.99,3538.82 1369.99,3538.82
RoomDefinition BackplaneSlot7 [InComponentClass('BackplaneSlot7')] p8: confinementstyle=ConfineIn formatcopy=TRUE lockcomponents=FALSE outline -30.01,1388.82 1169.99,1388.82 1169.99,3538.82 -30.01,3538.82
RoomDefinition BackplaneSlot6 [InComponentClass('BackplaneSlot6')] p9: confinementstyle=ConfineIn formatcopy=TRUE lockcomponents=FALSE outline 6970,6640 8170,6640 8170,8790 6970,8790
RoomDefinition BackplaneSlot5 [InComponentClass('BackplaneSlot5')] p10: confinementstyle=ConfineIn formatcopy=TRUE lockcomponents=FALSE outline 5570,6640 6770,6640 6770,8790 5570,8790
RoomDefinition BackplaneSlot4 [InComponentClass('BackplaneSlot4')] p11: confinementstyle=ConfineIn formatcopy=TRUE lockcomponents=FALSE outline 4170,6640 5370,6640 5370,8790 4170,8790
RoomDefinition BackplaneSlot3 [InComponentClass('BackplaneSlot3')] p12: confinementstyle=ConfineIn formatcopy=TRUE lockcomponents=FALSE outline 2594,6640 3970,6640 3970,8790 2594,8790
RoomDefinition BackplaneSlot2 [InComponentClass('BackplaneSlot2')] p13: confinementstyle=ConfineIn formatcopy=TRUE lockcomponents=FALSE outline 1370,6640 2570,6640 2570,8790 1370,8790
RoomDefinition BackplaneSlot1 [InComponentClass('BackplaneSlot1')] p14: confinementstyle=ConfineIn formatcopy=TRUE lockcomponents=FALSE outline -30,6640 1170,6640 1170,8790 -30,8790
RoutingVias [All] p1: holewidth=28 width=50 viastyle="Through Hole" minholewidth=10 minwidth=20 maxholewidth=50 maxwidth=100
SilkToSilkClearance [All] p1: silktosilkclearance=2
SilkscreenOverComponentPads [All] p1: minsilkscreentomaskgap=0
SolderMaskExpansion [All] p1: expansion=4
Width [All] p1: maxlimit=200 minlimit=5 preferedwidth=10
21 further rules are at their usual default settings.

## Classes and differential pairs
channel class "780-00029,rev3,Pg2,Backplane, Instrument Crate": BackplaneSlot1 BackplaneSlot2 BackplaneSlot3 BackplaneSlot4 BackplaneSlot5 BackplaneSlot6 BackplaneSlot7 BackplaneSlot8 BackplaneSlot9 BackplaneSlot10 BackplaneSlot11 BackplaneSlot12
net class PWR_ON[1..12]: PWR_ON1 PWR_ON2 PWR_ON3 PWR_ON4 PWR_ON5 PWR_ON6 PWR_ON7 PWR_ON8 PWR_ON9 PWR_ON10 PWR_ON11 PWR_ON12
net class PWR_OFF[1..12]: PWR_OFF1 PWR_OFF2 PWR_OFF3 PWR_OFF4 PWR_OFF5 PWR_OFF6 PWR_OFF7 PWR_OFF8 PWR_OFF9 PWR_OFF10 PWR_OFF11 PWR_OFF12
net class IMON_SLOT[1..12]: IMON_SLOT1 IMON_SLOT2 IMON_SLOT3 IMON_SLOT4 IMON_SLOT5 IMON_SLOT6 IMON_SLOT7 IMON_SLOT8 IMON_SLOT9 IMON_SLOT10 IMON_SLOT11 IMON_SLOT12
component class "780-00029,rev3,Pg3,Backplane, Instrument Crate": C1 C3 C4 C5 C6 C8 C9 D2 D3 D4 D5 J2 J3 J4 J5 L1 P1 P3 P4 R2 R3 R5 R6 R7 R8 R9 R10 R11 R12 R13 R14 R15 R16 R17 RN1 RN2 RN3 S1 S2 TP4 TP5 TP12 TP13 U1 U5 U6
component class BackplaneSlot1: C2A C21A D6A J1A K1A Q1A Q2A R4A R18A TP10A TP11A U4A
component class BackplaneSlot2: C2B C21B D6B J1B K1B Q1B Q2B R4B R18B TP10B TP11B U4B
component class BackplaneSlot3: C2C C21C D6C J1C K1C Q1C Q2C R4C R18C TP10C TP11C U4C
component class BackplaneSlot4: C2D C21D D6D J1D K1D Q1D Q2D R4D R18D TP10D TP11D U4D
component class BackplaneSlot5: C2E C21E D6E J1E K1E Q1E Q2E R4E R18E TP10E TP11E U4E
component class BackplaneSlot6: C2F C21F D6F J1F K1F Q1F Q2F R4F R18F TP10F TP11F U4F
component class BackplaneSlot7: C2G C21G D6G J1G K1G Q1G Q2G R4G R18G TP10G TP11G U4G
component class BackplaneSlot8: C2H C21H D6H J1H K1H Q1H Q2H R4H R18H TP10H TP11H U4H
component class BackplaneSlot9: C2I C21I D6I J1I K1I Q1I Q2I R4I R18I TP10I TP11I U4I
component class BackplaneSlot10: C2J C21J D6J J1J K1J Q1J Q2J R4J R18J TP10J TP11J U4J
component class BackplaneSlot11: C2K C21K D6K J1K K1K Q1K Q2K R4K R18K TP10K TP11K U4K
component class BackplaneSlot12: C2L C21L D6L J1L K1L Q1L Q2L R4L R18L TP10L TP11L U4L
component class "Power Supplies": BB1 BB2 BB3 BB4 BB5 BB6 C7 C10 C11 C12 C13 C14 C15 C16 C17 C18 C19 C22 D1 L2 P2 Q3 R1 R29 R30 R31 R32 R33 R34 S3 TP1 TP2 TP3 TP6 TP7 TP8 TP9 TP17 TP27 TP28 TP29 U2 U3 U7 U20 U21 U22

## Components (designator, comment, footprint, x,y, rotation, side; value= is the part's Value field where it differs from the comment)
BB1 "Bus Bar" "Bus Bar 1.5\" pitch" 7200,6950 r180 bottom
BB2 "Bus Bar" "Bus Bar 1.5\" pitch" 8300,1300 r90 bottom
BB3 "Bus Bar" "Bus Bar 1.5\" pitch" 7200,1700 r180 bottom locked
BB4 "Bus Bar" "Bus Bar 1.5\" pitch" 7200,8450 r180 bottom
BB5 "Bus Bar" "Bus Bar 1.5\" pitch" 8100,2800 r90 bottom
BB6 "Bus Bar" "Bus Bar 1.5\" pitch" 7200,3200 r180 bottom
C1 "1u" 2012[0805] 565,8915 r90 bottom
C2A "Cap SMD" SMD_0805 250,7740 r180 top (schematic designator C2)
C2B "Cap SMD" SMD_0805 1650,7740 r180 top (schematic designator C2)
C2C "Cap SMD" SMD_0805 3050,7740 r180 top (schematic designator C2)
C2D "Cap SMD" SMD_0805 4450,7740 r180 top (schematic designator C2)
C2E "Cap SMD" SMD_0805 5850,7740 r180 top (schematic designator C2)
C2F "Cap SMD" SMD_0805 7250,7740 r180 top (schematic designator C2)
C2G "Cap SMD" SMD_0805 249.99,2488.82 r180 top (schematic designator C2)
C2H "Cap SMD" SMD_0805 1649.99,2488.82 r180 top (schematic designator C2)
C2I "Cap SMD" SMD_0805 3049.99,2488.82 r180 top (schematic designator C2)
C2J "Cap SMD" SMD_0805 4449.99,2488.82 r180 top (schematic designator C2)
C2K "Cap SMD" SMD_0805 5849.99,2488.82 r180 top (schematic designator C2)
C2L "Cap SMD" SMD_0805 7249.99,2488.82 r180 top (schematic designator C2)
C3 "Cap SMD" SMD_0805 4165,9170.08 r270 bottom
C4 "Cap SMD" SMD_0805 1561,9301 r0 bottom
C5 "1u" SMD_0805 685,9640 r90 top
C6 "Cap SMD" SMD_0805 600,9640 r270 top
C7 "Cap SMD" SMD_0805 6646,9386 r90 top
C8 "Cap SMD" SMD_0805 4611,9630 r90 top
C9 "Cap SMD" SMD_0805 4612,9416 r270 top
C10 "1u" 2012[0805] 1410,982 r180 bottom
C11 "Cap SMD" SMD_0805 4538.8,794.34 r0 bottom
C12 "1u" 2012[0805] 1407,1162 r180 bottom
C13 "16V" SMD_0805 4113.8,1139.34 r180 bottom
C14 "Cap SMD" SMD_0805 4801.8,744.34 r270 top
C15 "25V" SMD_0805 4793.8,944.34 r90 bottom
C16 "16V" SMD_CAP_3216 2520,1029.6 r0 bottom
C17 "16V" SMD_CAP_3216 2515,614.6 r0 bottom
C18 "Low ESR" SMD_1206 3470,537 r90 bottom
C19 "Low ESR" SMD_1206 3119,739 r0 bottom
C21A "1u" SMD_0805 300,8016 r90 top (schematic designator C21)
C21B "1u" SMD_0805 1705,8026 r90 top (schematic designator C21)
C21C "1u" SMD_0805 3100,8034 r90 top (schematic designator C21)
C21D "1u" SMD_0805 4465,8041 r90 top (schematic designator C21)
C21E "1u" SMD_0805 5890,8026 r90 top (schematic designator C21)
C21F "1u" SMD_0805 7318,8002 r90 top (schematic designator C21)
C21G "1u" SMD_0805 302,2773 r90 top (schematic designator C21)
C21H "1u" SMD_0805 1715,2761 r90 top (schematic designator C21)
C21I "1u" SMD_0805 3145,2771 r90 top (schematic designator C21)
C21J "1u" SMD_0805 4509,2805 r90 top (schematic designator C21)
C21K "1u" SMD_0805 5895,2806 r90 top (schematic designator C21)
C21L "1u" SMD_0805 7285,2771 r90 top (schematic designator C21)
C22 "35V" "CAP, Thru Hole 10mm dia" 1425,9805 r180 bottom
D1 "SL43-E3/57T" DO-214AB 4474.8,1037.32 r90 bottom
D2 "PESD3V3L4UG" SOT-353 2820,4007.6 r270 bottom
D3 "PESD3V3L4UG" SOT-353 2820,3777.6 r270 bottom
D4 "PESD3V3L4UG" SOT-353 2820,3892.6 r270 bottom
D5 "PESD3V3L4UG" SOT-353 2890,3632.6 r270 bottom
D6A "BAV74" SOT23A 197.4,8426.26 r0 top (schematic designator D6)
D6B "BAV74" SOT23A 1567.4,8456.26 r0 top (schematic designator D6)
D6C "BAV74" SOT23A 2977.4,8451.26 r0 top (schematic designator D6)
D6D "BAV74" SOT23A 4387.4,8461.26 r0 top (schematic designator D6)
D6E "BAV74" SOT23A 5835,8498.74 r0 top (schematic designator D6)
D6F "BAV74" SOT23A 7070,8438.74 r0 top (schematic designator D6)
D6G "BAV74" SOT23A 180,3200 r0 top (schematic designator D6)
D6H "BAV74" SOT23A 1585,3190 r0 top (schematic designator D6)
D6I "BAV74" SOT23A 2955,3155 r0 top (schematic designator D6)
D6J "BAV74" SOT23A 4387.6,3166.26 r0 top (schematic designator D6)
D6K "BAV74" SOT23A 5815,3165 r0 top (schematic designator D6)
D6L "BAV74" SOT23A 7070,3155 r0 top (schematic designator D6)
Designator73 "Comment" "TARGET MECHANICAL 5" -845,-1420 r180 top
Designator74 "Comment" "TARGET MECHANICAL 5" -865,10455 r180 top
Designator75 "Comment" "TARGET MECHANICAL 5" 8905,10435 r180 top
J1A "PESC-02-12-02-01-S-VT-LC" PESC-02-12-02-01-S-VT-LC 765.51,7717.32 r0 top locked (schematic designator J1)
J1B "PESC-02-12-02-01-S-VT-LC" PESC-02-12-02-01-S-VT-LC 2165.51,7717.32 r0 top locked (schematic designator J1)
J1C "PESC-02-12-02-01-S-VT-LC" PESC-02-12-02-01-S-VT-LC 3565.51,7717.32 r0 top locked (schematic designator J1)
J1D "PESC-02-12-02-01-S-VT-LC" PESC-02-12-02-01-S-VT-LC 4965.51,7717.32 r0 top locked (schematic designator J1)
J1E "PESC-02-12-02-01-S-VT-LC" PESC-02-12-02-01-S-VT-LC 6365.51,7717.32 r0 top locked (schematic designator J1)
J1F "PESC-02-12-02-01-S-VT-LC" PESC-02-12-02-01-S-VT-LC 7765.51,7717.32 r0 top locked (schematic designator J1)
J1G "PESC-02-12-02-01-S-VT-LC" PESC-02-12-02-01-S-VT-LC 765.5,2466.14 r0 top locked (schematic designator J1)
J1H "PESC-02-12-02-01-S-VT-LC" PESC-02-12-02-01-S-VT-LC 2165.5,2466.14 r0 top locked (schematic designator J1)
J1I "PESC-02-12-02-01-S-VT-LC" PESC-02-12-02-01-S-VT-LC 3565.5,2466.14 r0 top locked (schematic designator J1)
J1J "PESC-02-12-02-01-S-VT-LC" PESC-02-12-02-01-S-VT-LC 4965.5,2466.14 r0 top locked (schematic designator J1)
J1K "PESC-02-12-02-01-S-VT-LC" PESC-02-12-02-01-S-VT-LC 6365.5,2466.14 r0 top locked (schematic designator J1)
J1L "PESC-02-12-02-01-S-VT-LC" PESC-02-12-02-01-S-VT-LC 7765.5,2466.14 r0 top locked (schematic designator J1)
J2 "15-91-0140" HDR2X7 2295,9556.08 r270 bottom
J3 "RJHSE-3381" "RJ45, VERT MOUNT, NO MAGNETICS" 6353,9418.08 r90 bottom
J4 "61729-0010BLF" "USB Vertical PCB" 3409,9368.08 r0 bottom
J5 "Molex 43045-0412" "CONN Molex Micro-fit, 4 POS" 4093.94,9467.06 r180 bottom
K1A "Dual-Latching, 24V" "RELAY, TYCO RT1" 400,8200 r270 bottom (schematic designator K1)
K1B "Dual-Latching, 24V" "RELAY, TYCO RT1" 1800,8200 r270 bottom (schematic designator K1)
K1C "Dual-Latching, 24V" "RELAY, TYCO RT1" 3200,8200 r270 bottom (schematic designator K1)
K1D "Dual-Latching, 24V" "RELAY, TYCO RT1" 4600,8200 r270 bottom (schematic designator K1)
K1E "Dual-Latching, 24V" "RELAY, TYCO RT1" 6000,8200 r270 bottom (schematic designator K1)
K1F "Dual-Latching, 24V" "RELAY, TYCO RT1" 7400,8200 r270 bottom (schematic designator K1)
K1G "Dual-Latching, 24V" "RELAY, TYCO RT1" 399.99,2948.82 r270 bottom (schematic designator K1)
K1H "Dual-Latching, 24V" "RELAY, TYCO RT1" 1799.99,2948.82 r270 bottom (schematic designator K1)
K1I "Dual-Latching, 24V" "RELAY, TYCO RT1" 3199.99,2948.82 r270 bottom (schematic designator K1)
K1J "Dual-Latching, 24V" "RELAY, TYCO RT1" 4599.99,2948.82 r270 bottom (schematic designator K1)
K1K "Dual-Latching, 24V" "RELAY, TYCO RT1" 5999.99,2948.82 r270 bottom (schematic designator K1)
K1L "Dual-Latching, 24V" "RELAY, TYCO RT1" 7399.99,2948.82 r270 bottom (schematic designator K1)
L1 "S558-5999-J1-F" "10/100BT Magetics module" 5987,9445.08 r270 bottom
L2 "445-3869-1-ND" "Inductor TDC SLF" 4183.8,944.34 r90 bottom
P1 "Header 2" "HDR1X2 for IDC" 4997,9071 r90 bottom
P2 "Header PWR 4 Pin" "HDR-4 PIN W/SCREW" 7613,9436.08 r180 bottom
P3 "COAX MMCX" MMCX2.54-V5 5286,9476.08 r180 bottom
P4 "Header 2" "HDR1X2 for IDC" 1287,9203 r90 bottom
Q1A "ZXMN3B14FTA" SOT-23B 400,8485 r180 top (schematic designator Q1)
Q1B "ZXMN3B14FTA" SOT-23B 1800,8485 r180 top (schematic designator Q1)
Q1C "ZXMN3B14FTA" SOT-23B 3200,8485 r180 top (schematic designator Q1)
Q1D "ZXMN3B14FTA" SOT-23B 4600,8485 r180 top (schematic designator Q1)
Q1E "ZXMN3B14FTA" SOT-23B 6000,8485 r180 top (schematic designator Q1)
Q1F "ZXMN3B14FTA" SOT-23B 7400,8485 r180 top (schematic designator Q1)
Q1G "ZXMN3B14FTA" SOT-23B 399.99,3233.82 r180 top (schematic designator Q1)
Q1H "ZXMN3B14FTA" SOT-23B 1799.99,3233.82 r180 top (schematic designator Q1)
Q1I "ZXMN3B14FTA" SOT-23B 3199.99,3233.82 r180 top (schematic designator Q1)
Q1J "ZXMN3B14FTA" SOT-23B 4599.99,3233.82 r180 top (schematic designator Q1)
Q1K "ZXMN3B14FTA" SOT-23B 5999.99,3233.82 r180 top (schematic designator Q1)
Q1L "ZXMN3B14FTA" SOT-23B 7399.99,3233.82 r180 top (schematic designator Q1)
Q2A "ZXMN3B14FTA" SOT-23B 105,8685 r180 top (schematic designator Q2)
Q2B "ZXMN3B14FTA" SOT-23B 1505,8685 r180 top (schematic designator Q2)
Q2C "ZXMN3B14FTA" SOT-23B 2905,8685 r180 top (schematic designator Q2)
Q2D "ZXMN3B14FTA" SOT-23B 4305,8685 r180 top (schematic designator Q2)
Q2E "ZXMN3B14FTA" SOT-23B 5705,8685 r180 top (schematic designator Q2)
Q2F "ZXMN3B14FTA" SOT-23B 7105,8685 r180 top (schematic designator Q2)
Q2G "ZXMN3B14FTA" SOT-23B 104.99,3433.82 r180 top (schematic designator Q2)
Q2H "ZXMN3B14FTA" SOT-23B 1504.99,3433.82 r180 top (schematic designator Q2)
Q2I "ZXMN3B14FTA" SOT-23B 2904.99,3433.82 r180 top (schematic designator Q2)
Q2J "ZXMN3B14FTA" SOT-23B 4535.5,3471.14 r180 top (schematic designator Q2)
Q2K "ZXMN3B14FTA" SOT-23B 5704.99,3433.82 r180 top (schematic designator Q2)
Q2L "ZXMN3B14FTA" SOT-23B 7104.99,3433.82 r180 top (schematic designator Q2)
Q3 "FDV304P" SMD_SOT23_3 7331,9193 r90 top
R1 "Res 0805" SMD_0805 7652.48,9027.08 r0 bottom
R2 "Res 0805" SMD_0805 565,9080 r90 bottom
R3 "Res 0805" SMD_0805 498,9653.08 r0 bottom
R4A "1W (2512)" 6332[2512] 100,7906 r270 top (schematic designator R4)
R4B "1W (2512)" 6332[2512] 1500,7911 r270 top (schematic designator R4)
R4C "1W (2512)" 6332[2512] 2900,7916 r270 top (schematic designator R4)
R4D "1W (2512)" 6332[2512] 4300,7930 r270 top (schematic designator R4)
R4E "1W (2512)" 6332[2512] 5700,7911 r270 top (schematic designator R4)
R4F "1W (2512)" 6332[2512] 7100,7910 r270 top (schematic designator R4)
R4G "1W (2512)" 6332[2512] 99.99,2658.82 r270 top (schematic designator R4)
R4H "1W (2512)" 6332[2512] 1500,2656 r270 top (schematic designator R4)
R4I "1W (2512)" 6332[2512] 2900,2651.24 r270 top (schematic designator R4)
R4J "1W (2512)" 6332[2512] 4299.99,2656 r270 top (schematic designator R4)
R4K "1W (2512)" 6332[2512] 5700,2656 r270 top (schematic designator R4)
R4L "1W (2512)" 6332[2512] 7099.99,2658.82 r270 top (schematic designator R4)
R5 "4.7k" 2012[0805] 2046,9245.08 r270 bottom
R6 "Res 0805" SMD_0805 6571,9548.08 r180 top
R7 "Res 0805" SMD_0805 6584,9008.08 r180 top
R8 "Res 0805" SMD_0805 4340,9170.08 r270 bottom
R9 "Res 0805" SMD_0805 4250,9170.08 r90 bottom
R10 "Res 0805" SMD_0805 1561,9126 r0 bottom
R11 "Res 0805" SMD_0805 1561,9211 r180 bottom
R12 "Res 0805" SMD_0805 750,9639 r270 top
R13 "Res 0805" SMD_0805 2697,2649 r90 bottom
R14 "Res 0805" SMD_0805 4882,9539 r0 bottom
R15 "Res 0805" SMD_0805 4881,9474 r180 bottom
R16 "Res 0805" SMD_0805 4398,9446 r90 bottom
R17 "Res 0805" SMD_0805 3824,9484 r90 bottom
R18A "Res 0805" SMD_0805 375,7926 r270 top (schematic designator R18)
R18B "Res 0805" SMD_0805 1774,7937 r270 top (schematic designator R18)
R18C "Res 0805" SMD_0805 3171,7945 r270 top (schematic designator R18)
R18D "Res 0805" SMD_0805 4570,7951 r270 top (schematic designator R18)
R18E "Res 0805" SMD_0805 5975,7936 r270 top (schematic designator R18)
R18F "Res 0805" SMD_0805 7390,7913 r270 top (schematic designator R18)
R18G "Res 0805" SMD_0805 375,2613 r270 top (schematic designator R18)
R18H "Res 0805" SMD_0805 1785,2671 r270 top (schematic designator R18)
R18I "Res 0805" SMD_0805 3230,2681 r270 top (schematic designator R18)
R18J "Res 0805" SMD_0805 4583,2715 r270 top (schematic designator R18)
R18K "Res 0805" SMD_0805 5980,2716 r270 top (schematic designator R18)
R18L "Res 0805" SMD_0805 7375,2676 r270 top (schematic designator R18)
R29 "Res 0805" SMD_0805 4643.8,1039.34 r0 top
R30 "Res 0805" SMD_0805 4708.8,1144.34 r270 bottom
R31 "Res 0805" SMD_0805 4788.8,1144.34 r270 bottom
R32 "Res 0805" SMD_0805 4713.8,734.34 r270 bottom
R33 "Res 0805" SMD_0805 4803.8,739.34 r90 bottom
R34 "Res 0805" SMD_0805 4713.8,739.34 r90 top
RN1 "RES ARRAY  x4 10K" "RES ARRAY 0603 x 4" 3600,4227.6 r90 bottom
RN2 "RES ARRAY  x4 10K" "RES ARRAY 0603 x 4" 3630,3882.6 r90 bottom
RN3 "RES ARRAY  x4 10K" "RES ARRAY 0603 x 4" 3630,3702.6 r90 bottom
S1 "B3U-1000P" B3U-1000P 747,9048 r180 bottom
S2 "B3U-1000P" B3U-1000P 727,9652 r180 bottom
S3 "CJS-1200TB" CAS-120B 7057,9018 r180 bottom
TP1 "Test point" PAD_80D_052H 1274,3922.08 r180 bottom
TP2 "Test point" PAD_80D_052H 1967,576 r180 bottom
TP3 "Test point" PAD_80D_052H 7562,687.08 r180 bottom
TP4 "Test Point SMD" "SMD_TEST POINT" 4025,9095.08 r90 bottom
TP5 "Test Point SMD" "SMD_TEST POINT" 1748,9471 r90 bottom
TP6 "Test point" PAD_80D_052H 6902,3972.08 r180 bottom
TP7 "Test point" PAD_80D_052H 1945,9805 r180 bottom
TP8 "Test point" PAD_80D_052H 6952,9789.08 r180 bottom
TP9 "Test Point SMD" "SMD_TEST POINT" 4557,9872.08 r270 bottom
TP10A "Test point" PAD_80D_052H 301,6712 r0 bottom (schematic designator TP10)
TP10B "Test point" PAD_80D_052H 1701,6712 r0 bottom (schematic designator TP10)
TP10C "Test point" PAD_80D_052H 2664,7157 r0 bottom (schematic designator TP10)
TP10D "Test point" PAD_80D_052H 4501,6712 r0 bottom (schematic designator TP10)
TP10E "Test point" PAD_80D_052H 5901,6712 r0 bottom (schematic designator TP10)
TP10F "Test point" PAD_80D_052H 7301,6712 r0 bottom (schematic designator TP10)
TP10G "Test point" PAD_80D_052H 300.99,1460.82 r0 bottom (schematic designator TP10)
TP10H "Test point" PAD_80D_052H 1700.99,1460.82 r0 bottom (schematic designator TP10)
TP10I "Test point" PAD_80D_052H 3100.99,1460.82 r0 bottom (schematic designator TP10)
TP10J "Test point" PAD_80D_052H 4500.99,1460.82 r0 bottom (schematic designator TP10)
TP10K "Test point" PAD_80D_052H 5900.99,1460.82 r0 bottom (schematic designator TP10)
TP10L "Test point" PAD_80D_052H 7300.99,1460.82 r0 bottom (schematic designator TP10)
TP11A "Test point" PAD_80D_052H 285,8739 r0 bottom (schematic designator TP11)
TP11B "Test point" PAD_80D_052H 1685,8739 r0 bottom (schematic designator TP11)
TP11C "Test point" PAD_80D_052H 3085,8739 r0 bottom (schematic designator TP11)
TP11D "Test point" PAD_80D_052H 4485,8739 r0 bottom (schematic designator TP11)
TP11E "Test point" PAD_80D_052H 5885,8739 r0 bottom (schematic designator TP11)
TP11F "Test point" PAD_80D_052H 7285,8739 r0 bottom (schematic designator TP11)
TP11G "Test point" PAD_80D_052H 284.99,3487.82 r0 bottom (schematic designator TP11)
TP11H "Test point" PAD_80D_052H 1684.99,3487.82 r0 bottom (schematic designator TP11)
TP11I "Test point" PAD_80D_052H 2695.5,2941.14 r0 bottom (schematic designator TP11)
TP11J "Test point" PAD_80D_052H 4085.5,2921.14 r0 bottom (schematic designator TP11)
TP11K "Test point" PAD_80D_052H 5884.99,3487.82 r0 bottom (schematic designator TP11)
TP11L "Test point" PAD_80D_052H 7284.99,3487.82 r0 bottom (schematic designator TP11)
TP12 "Test Point SMD" "SMD_TEST POINT" 5497,9887.08 r90 bottom
TP13 "Test Point SMD" "SMD_TEST POINT" 5839,9894.08 r90 bottom
TP17 "Test Point SMD" "SMD_TEST POINT" 3163,9870.08 r90 bottom
TP27 "Test Point SMD" "SMD_TEST POINT" 2656,9877.08 r90 bottom
TP28 "Test Point SMD" "SMD_TEST POINT" 3794,9859.08 r270 bottom
TP29 "Test Point SMD" "SMD_TEST POINT" 4175,9855.08 r90 bottom
U1 "LM555CMX" M08A_M 710,9388 r90 top
U2 "M24C32RMN1" SOP8_N 6852,9361 r0 top
U3 "DS2411" SMD_SOT23_3 7161,9191 r90 top
U4A "100 V/V" SMD_SOT23_5 245,7850 r270 top (schematic designator U4)
U4B "100 V/V" SMD_SOT23_5 1645,7850 r270 top (schematic designator U4)
U4C "100 V/V" SMD_SOT23_5 3045,7850 r270 top (schematic designator U4)
U4D "100 V/V" SMD_SOT23_5 4445,7850 r270 top (schematic designator U4)
U4E "100 V/V" SMD_SOT23_5 5845,7850 r270 top (schematic designator U4)
U4F "100 V/V" SMD_SOT23_5 7245,7850 r270 top (schematic designator U4)
U4G "100 V/V" SMD_SOT23_5 244.99,2598.82 r270 top (schematic designator U4)
U4H "100 V/V" SMD_SOT23_5 1644.99,2598.82 r270 top (schematic designator U4)
U4I "100 V/V" SMD_SOT23_5 3044.99,2598.82 r270 top (schematic designator U4)
U4J "100 V/V" SMD_SOT23_5 4444.99,2598.82 r270 top (schematic designator U4)
U4K "100 V/V" SMD_SOT23_5 5844.99,2598.82 r270 top (schematic designator U4)
U4L "100 V/V" SMD_SOT23_5 7244.99,2598.82 r270 top (schematic designator U4)
U5 "SuperFin Module" "SuperFin Footprint" 2585.5,3431.14 r90 bottom locked
U6 "LT1007CS8#PBF" S8_M 4611,9514 r180 bottom
U7 "Voltage Reg, Fixed" "TO-252(D-PAK)  PowerPAD" 3375.43,909.31 r90 bottom
U20 "Voltage Reg, Fixed" "TO-252(D-PAK)  POWERPAD" 1738,1071 r0 bottom
U21 "LT3682" DD12/DFN12 4738.8,834.34 r90 bottom
U22 "LTC1144" S8_M 2525,814.6 r90 bottom

## Footprints (in the part's own frame and the unit in brackets; to place one, negate y for a bottom-side part, rotate by r counter-clockwise, add the part's x,y. Pads: shape width x height; smd on the part's side, far side on the other; paste and mask are expansions set on the pad)
"10/100BT Magetics module" [mil] "bel p/n S558-6-5999-J1-F"
  rect 25x70 smd: 1(0,0) 2(50,0) 3(100,0) 4(150,0) 5(200,0) 6(250,0) 7(300,0) 8(350,0) 9(350,355) 10(300,355) 11(250,355) 12(200,355) 13(150,355) 14(100,355) 15(50,355) 16(0,355)
  silkscreen extent -50,5 375,300
2012[0805] [mm] "Chip Resistor; Body 2.0 x 1.3 mm (LxW typ)"
  rect 1.3x1.5 smd: 1(-0.95,0) 2(0.95,0)
6332[2512] [mm] "Chip Resistor; Body 6.3 x 3.2 mm (LxW typ)"
  rect 1.8x3.2 smd: 1(-2.8,0) 2(2.8,0)
  silkscreen extent -1.6,-1.5 1.6,1.5
B3U-1000P [mil] "Pushbutton without ground terminal, without boss"
  rect 40x67 smd: 1(-71,0) 2(71,0)
  silkscreen extent -45,-50 45,50
"Bus Bar 1.5\" pitch" [mil] "Rigid/Bus Bar"
  round 110 hole 70: 1(0,0) 1(1500,0) 1(3000,0) 1(4500,0) 1(6000,0)
  silkscreen extent -100,-40 6100,40
"CAP, Thru Hole 10mm dia" [mm]
  rect 2x2 hole 1.2: 1(2.5,0)
  round 2 hole 1.2: 2(-2.5,0)
  silkscreen extent -5.1,-5.1 8,5.1
CAS-120B [mm] "Copal Electronics CAS SMD Slide Switch"
  rect 1x1.5 smd: 1(-1.75,-1.95) 2(0,1.95) 3(1.75,-1.95)
  silkscreen extent -2.69,-1 2.69,1
"CONN Molex Micro-fit, 4 POS" [mil] "Thru Hole Vert 4-pos"
  round 40 hole 40 unplated: 0(-177.17,96.06) 0(177.17,96.06)
  rect 70x70 hole 40: 1(59.06,-59.06)
  round 70 hole 40: 2(-59.06,-59.06) 3(59.06,59.06) 4(-59.06,59.06)
  silkscreen extent -199,-144 199,197
DD12/DFN12 [mm] "SON, 12-Leads, Body 3x3 mm, Pitch 0.45mm, IPC High Density"
  oval 0.6x0.25 smd: 1(0,0) 2(0,-0.45) 3(0,-0.9) 4(0,-1.35) 5(0,-1.8) 6(0,-2.25) 7(2.9,-2.25) 8(2.9,-1.8) 9(2.9,-1.35) 10(2.9,-0.9) 11(2.9,-0.45) 12(2.9,0)
  rect 1.65x2.38 smd: 13(1.45,-1.125)
  silkscreen extent -0.97,-2.68 3,0.5, body extent -0.1,-2.68 3,0.42, height 0.8
DO-214AB [mil] "DO-214-AB/SMC; 2 C-Bend Leads; Body 7.9 x 5.9 mm, inc. leads (LxW)"
  rect 60x126 smd: 1(-121.81,0) 2(121.81,0)
  silkscreen extent -170,-120 179,120
"HDR1X2 for IDC" [mm] "Connector; Header; 4 Position"
  rect 1.5x1.5 hole 0.9: 1(0,0)
  round 1.5 hole 0.9: 2(2.54,0)
  silkscreen extent -1.4,-2.54 3.81,2.54
HDR2X7 [mm] "Connector; Header; 7x2 Position"
  rect 1.5x1.5 hole 0.9: 1(0,0)
  round 1.5 hole 0.9: 2(0,2.54) 3(2.54,0) 4(2.54,2.54) 5(5.08,0) 6(5.08,2.54) 7(7.62,0) 8(7.62,2.54) 9(10.16,0) 10(10.16,2.54) 11(12.7,0) 12(12.7,2.54) 13(15.24,0) 14(15.24,2.54)
  silkscreen extent -1.27,-1.27 16.51,3.81
"HDR-4 PIN W/SCREW" [mm] "TYCO p/n 796867-4"
  rect 2.5x2.5 hole 1.5: 1(-7.62,0)
  round 2.5 hole 1.5: 2(-2.54,0) 3(2.54,0) 4(7.62,0)
  silkscreen extent -15.16,-6.25 15.24,6.25
"Inductor TDC SLF" [mm] "SLF series"
  rect 2.2x1.5 smd: 1(0,3.2) 2(0,-3.2)
  silkscreen extent -3.5,-3.5 3.5,3.5
M08A_M [mm] "SOIC, 8-Leads, Body 4.9x3.9mm, Pitch 1.27mm, IPC Low Density"
  oval 2.5x0.7 smd: 1(-2.45,1.905) 2(-2.45,0.635) 3(-2.45,-0.635) 4(-2.45,-1.905) 5(2.45,-1.905) 6(2.45,-0.635) 7(2.45,0.635) 8(2.45,1.905)
  silkscreen extent -2.57,-2.5 0.8,2.93, body extent -2,-2.5 2,2.5, height 1.75
MMCX2.54-V5 [mm] "Connector; RF Coaxial, MMCX, Thru-Hole; 5 Position; Vertical"
  round 1.4 hole 0.85: 1(0,0) 2(-1.27,-1.27) 3(1.27,-1.27) 4(1.27,1.27) 5(-1.27,1.27)
  silkscreen extent -1.75,-1.75 1.75,1.75
PAD_80D_052H [mil]
  round 80 hole 52: 1(0,0)
PESC-02-12-02-01-S-VT-LC [mil] "SAMTEC FEM SOCKETS, PWR(4), SIGNAL(12), VERT MOUNT"
  round 59.06 hole 98 unplated: 0(-87,-875) 0(-87,875)
  round 65 hole 40: 1(-150,-100) 2(-50,-100) 3(50,-100) 4(150,-100) 5(-150,0) 6(-50,0) 7(50,0) 8(150,0) 9(-150,100) 10(-50,100) 11(50,100) 12(150,100)
  round 80 hole 52: 13(-150,-625) 13(-150,-525) 13(-50,-625) 13(-50,-525) 13(50,-625) 13(50,-525) 13(150,-625) 13(150,-525) 14(-150,-375) 14(-150,-275) 14(-50,-375) 14(-50,-275) 14(50,-375) 14(50,-275) 14(150,-375) 14(150,-275) 15(-150,275) 15(-150,375) 15(-50,275) 15(-50,375) 15(50,275) 15(50,375) 15(150,275) 15(150,375) 16(-150,525) 16(-150,625) 16(-50,525) 16(-50,625) 16(50,525) 16(50,625) 16(150,525) 16(150,625)
  silkscreen extent -225,-1025 250,1025
"RELAY, TYCO RT1" [mm] "TYCO/SCHRACK RT314F24"
  rect 2.5x2.5 hole 1.3: 1(0,0)
  round 2.5 hole 1.3: 2(0,7.5) 3(0,3.75) 11(20,0) 11(20,7.5) 12(15,0) 12(15,7.5) 14(25,0) 14(25,7.5)
  silkscreen extent -2.5,-2.5 27.5,10
"RES ARRAY 0603 x 4" [mm]
  rect 0.44x1.15 smd: 1(0,0.1) 2(0,2.05) 3(0.8,0.1) 4(0.8,2.05) 5(1.6,0.1) 6(1.6,2.05) 7(2.4,0.1) 8(2.4,2.05)
  silkscreen extent -0.6,-0.6 3,1.8
"RJ45, VERT MOUNT, NO MAGNETICS" [mil] "Amphenol p/n RJHSE-3381"
  rect 55x55 hole 35: 1(0,0)
  round 55 hole 35: 2(-40,-100) 3(-80,0) 4(-120,-100) 5(-160,0) 6(-200,-100) 7(-240,0) 8(-280,-100) 9(130,95) 10(40,95) 11(-320,95) 12(-410,95)
  round 85 hole 62: 13(180,32) 14(-460,32)
  round 116.14 hole 127.95 unplated: MH1(110,-135) MH2(-390,-135)
  silkscreen extent -460,-235 180,305
S8_M [mm] "8-Pin Small Outline Integrated Circuit 1.27 mm Pitch, IPC Low Density"
  oval 2.5x0.7 smd: 1(-2.45,1.905) 2(-2.45,0.635) 3(-2.45,-0.635) 4(-2.45,-1.905) 5(2.45,-1.905) 6(2.45,-0.635) 7(2.45,0.635) 8(2.45,1.905)
  silkscreen extent -2.58,-2.5 0.8,2.93, body extent -2,-2.5 2,2.5, height 1.76
SMD_0805 [mil]
  rect 50x50 smd: 1(-45,0) 2(45,0)
  silkscreen extent -1,-1 1,1
SMD_1206 [mil]
  rect 63x75 smd: 1(-55,0) 2(55,0)
SMD_CAP_3216 [mil]
  rect 78x48 smd: 1(55,0) 2(-55,0)
  silkscreen extent -108,-65 134,38
SMD_SOT23_3 [mil]
  rect 36x36 smd: 1(-37,-43) 2(37,-43) 3(0,43)
  silkscreen extent -57,-25 57,25
SMD_SOT23_5 [mil]
  rect 28x36 smd: 1(37,43) 2(0,43) 3(-37,43)
  rect 36x36 smd: 4(-37,-43) 5(37,-43)
  silkscreen extent -57,-25 57,85
"SMD_TEST POINT" [mil] "Keystone 5015"
  rect 135x70 smd: 1(0,0)
SOP8_N [mm] "SOIC, 8-Leads, Body 4.9x3.9mm, Pitch 1.27mm, IPC Medium Density"
  oval 2x0.6 smd: 1(-2.5,1.905) 2(-2.5,0.635) 3(-2.5,-0.635) 4(-2.5,-1.905) 5(2.5,-1.905) 6(2.5,-0.635) 7(2.5,0.635) 8(2.5,1.905)
  silkscreen extent -2.62,-2.5 1.1,2.88, body extent -2,-2.5 2,2.5, height 1.75
SOT23A [mm] "SOT-23; 3 Leads; Body 3.0 x 2.5 mm, inc. leads (LxW max)"
  rect 0.9x0.95 smd: 1(-0.95,-1.175) 2(0.95,-1.175) 3(0,1.175)
  silkscreen extent -2.07,-1.3 1.3,1.18
SOT-23B [mm] "SOT-23; 3 Leads; Body 3.0 x 2.6 mm, inc. leads (LxW max)"
  rect 0.9x0.95 smd: 1(-0.95,-1.25) 2(0.95,-1.25) 3(0,1.25)
  silkscreen extent -2.08,-1.37 1.3,1.25
SOT-353 [mm]
  rect 0.5x0.5 smd: 1(0,0) 3(0,-1.5) 4(1.8,-1.5) 5(1.8,0)
  rect 0.5x0.4 smd: 2(0,-0.75)
  silkscreen extent 0.5,-1.9 2.3,0.4
"SuperFin Footprint" [mm] "SAMTEC QTH-060-01-L-D-A (x2)"
  round 5.6 hole 4.22: 0(0,43) 0(84,0) 0(84,43)
  round 1 hole 1.02 unplated: 0(38.04,13.08) 0(38.04,33.15) 1(-0.44,13.08) 1(-0.44,33.15)
  rect 0.3x1.45 smd paste+0 mask+0.05: A1(36.05,12.03) A2(36.05,18.21) A3(35.55,12.03) A4(35.55,18.21) A5(35.05,12.03) A6(35.05,18.21) A7(34.55,12.03) A8(34.55,18.21) A9(34.05,12.03) A10(34.05,18.21) A11(33.55,12.03) A12(33.55,18.21) A13(33.05,12.03) A14(33.05,18.21) A15(32.55,12.03) A16(32.55,18.21) A17(32.05,12.03) A18(32.05,18.21) A19(31.55,12.03) A20(31.55,18.21) A21(31.05,12.03) A22(31.05,18.21) A23(30.55,12.03) A24(30.55,18.21) A25(30.05,12.03) A26(30.05,18.21) A27(29.55,12.03) A28(29.55,18.21) A29(29.05,12.03) A30(29.05,18.21) A31(28.55,12.03) A32(28.55,18.21) A33(28.05,12.03) A34(28.05,18.21) A35(27.55,12.03) A36(27.55,18.21) A37(27.05,12.03) A38(27.05,18.21) A39(26.55,12.03) A40(26.55,18.21) A41(26.05,12.03) A42(26.05,18.21) A43(25.55,12.03) A44(25.55,18.21) A45(25.05,12.03) A46(25.05,18.21) A47(24.55,12.03) A48(24.55,18.21) A49(24.05,12.03) A50(24.05,18.21) A51(23.55,12.03) A52(23.55,18.21) A53(23.05,12.03) A54(23.05,18.21) A55(22.55,12.03) A56(22.55,18.21) A57(22.05,12.03) A58(22.05,18.21) A59(21.55,12.03) A60(21.55,18.21) A61(16.05,12.03) A62(16.05,18.21) A63(15.55,12.03) A64(15.55,18.21) A65(15.05,12.03) A66(15.05,18.21) A67(14.55,12.03) A68(14.55,18.21) A69(14.05,12.03) A70(14.05,18.21) A71(13.55,12.03) A72(13.55,18.21) A73(13.05,12.03) A74(13.05,18.21) A75(12.55,12.03) A76(12.55,18.21) A77(12.05,12.03) A78(12.05,18.21) A79(11.55,12.03) A80(11.55,18.21) A81(11.05,12.03) A82(11.05,18.21) A83(10.55,12.03) A84(10.55,18.21) A85(10.05,12.03) A86(10.05,18.21) A87(9.55,12.03) A88(9.55,18.21) A89(9.05,12.03) A90(9.05,18.21) A91(8.55,12.03) A92(8.55,18.21) A93(8.05,12.03) A94(8.05,18.21) A95(7.55,12.03) A96(7.55,18.21) A97(7.05,12.03) A98(7.05,18.21) A99(6.55,12.03) A100(6.55,18.21) A101(6.05,12.03) A102(6.05,18.21) A103(5.55,12.03) A104(5.55,18.21) A105(5.05,12.03) A106(5.05,18.21) A107(4.55,12.03) A108(4.55,18.21) A109(4.05,12.03) A110(4.05,18.21) A111(3.55,12.03) A112(3.55,18.21) A113(3.05,12.03) A114(3.05,18.21) A115(2.55,12.03) A116(2.55,18.21) A117(2.05,12.03) A118(2.05,18.21) A119(1.55,12.03) A120(1.55,18.21) B1(36.05,32.1) B2(36.05,38.28) B3(35.55,32.1) B4(35.55,38.28) B5(35.05,32.1) B6(35.05,38.28) B7(34.55,32.1) B8(34.55,38.28) B9(34.05,32.1) B10(34.05,38.28) B11(33.55,32.1) B12(33.55,38.28) B13(33.05,32.1) B14(33.05,38.28) B15(32.55,32.1) B16(32.55,38.28) B17(32.05,32.1) B18(32.05,38.28) B19(31.55,32.1) B20(31.55,38.28) B21(31.05,32.1) B22(31.05,38.28) B23(30.55,32.1) B24(30.55,38.28) B25(30.05,32.1) B26(30.05,38.28) B27(29.55,32.1) B28(29.55,38.28) B29(29.05,32.1) B30(29.05,38.28) B31(28.55,32.1) B32(28.55,38.28) B33(28.05,32.1) B34(28.05,38.28) B35(27.55,32.1) B36(27.55,38.28) B37(27.05,32.1) B38(27.05,38.28) B39(26.55,32.1) B40(26.55,38.28) B41(26.05,32.1) B42(26.05,38.28) B43(25.55,32.1) B44(25.55,38.28) B45(25.05,32.1) B46(25.05,38.28) B47(24.55,32.1) B48(24.55,38.28) B49(24.05,32.1) B50(24.05,38.28) B51(23.55,32.1) B52(23.55,38.28) B53(23.05,32.1) B54(23.05,38.28) B55(22.55,32.1) B56(22.55,38.28) B57(22.05,32.1) B58(22.05,38.28) B59(21.55,32.1) B60(21.55,38.28) B61(16.05,32.1) B62(16.05,38.28) B63(15.55,32.1) B64(15.55,38.28) B65(15.05,32.1) B66(15.05,38.28) B67(14.55,32.1) B68(14.55,38.28) B69(14.05,32.1) B70(14.05,38.28) B71(13.55,32.1) B72(13.55,38.28) B73(13.05,32.1) B74(13.05,38.28) B75(12.55,32.1) B76(12.55,38.28) B77(12.05,32.1) B78(12.05,38.28) B79(11.55,32.1) B80(11.55,38.28) B81(11.05,32.1) B82(11.05,38.28) B83(10.55,32.1) B84(10.55,38.28) B85(10.05,32.1) B86(10.05,38.28) B87(9.55,32.1) B88(9.55,38.28) B89(9.05,32.1) B90(9.05,38.28) B91(8.55,32.1) B92(8.55,38.28) B93(8.05,32.1) B94(8.05,38.28) B95(7.55,32.1) B96(7.55,38.28) B97(7.05,32.1) B98(7.05,38.28) B99(6.55,32.1) B100(6.55,38.28) B101(6.05,32.1) B102(6.05,38.28) B103(5.55,32.1) B104(5.55,38.28) B105(5.05,32.1) B106(5.05,38.28) B107(4.55,32.1) B108(4.55,38.28) B109(4.05,32.1) B110(4.05,38.28) B111(3.55,32.1) B112(3.55,38.28) B113(3.05,32.1) B114(3.05,38.28) B115(2.55,32.1) B116(2.55,38.28) B117(2.05,32.1) B118(2.05,38.28) B119(1.55,32.1) B120(1.55,38.28)
  rect 2.54x0.64 smd: A121(20.355,15.12) A121(37.245,15.12) A122(0.355,15.12) A122(17.245,15.12) B121(20.355,35.19) B121(37.245,35.19) B122(0.355,35.19) B122(17.245,35.19)
  rect 4.7x0.64 smd: A121(25.625,15.12) A121(31.975,15.12) A122(5.625,15.12) A122(11.975,15.12) B121(25.625,35.19) B121(31.975,35.19) B122(5.625,35.19) B122(11.975,35.19)
  silkscreen extent -3,-3.5 87,46.5
"TARGET MECHANICAL 5" [mil]
"TO-252(D-PAK)  PowerPAD" [mil] "D-PAK, 3-Pads, Body 6.2x6.7mm (max), IPC Medium Density"
  rect 74.8x37.4 smd: 1(-171.26,89.76) 3(-171.26,-89.76)
  round 20 hole 10: 2(-39.37,-78.74) 2(-39.37,-19.69) 2(-39.37,39.37) 2(-39.37,98.43) 2(19.69,-98.43) 2(19.69,-39.37) 2(19.69,19.68) 2(19.69,78.74) 2(78.74,-78.74) 2(78.74,-19.69) 2(78.74,39.37) 2(78.74,98.43) 2(137.8,-98.43) 2(137.8,-39.37) 2(137.8,19.68) 2(137.8,78.74)
  rect 271.65x267.72 smd: 2(59.06,0)
  silkscreen extent -176,-132 -88,135, body extent -98,-132 146,132, height 94
"TO-252(D-PAK)  POWERPAD" [mil] "D-PAK, 3-Pads, Body 6.2x6.7mm (max), IPC Medium Density"
  rect 74.8x37.4 smd: 1(-171.26,89.76) 3(-171.26,-89.76)
  round 20 hole 10: 2(-39.37,-78.74) 2(-39.37,-19.69) 2(-39.37,39.37) 2(-39.37,98.43) 2(19.69,-98.43) 2(19.69,-39.37) 2(19.69,19.69) 2(19.69,78.74) 2(78.74,-78.74) 2(78.74,-19.69) 2(78.74,39.37) 2(78.74,98.43) 2(137.8,-98.43) 2(137.8,-39.37) 2(137.8,19.69) 2(137.8,78.74)
  rect 271.65x267.72 smd: 2(59.06,0)
  silkscreen extent -176,-132 -79,135, body extent -98,-132 146,132, height 94
"USB Vertical PCB" [mm] "EDAC USB typeB p/n 690-004-260-023"
  round 2 hole 0.92: 1(-4.77,2.71) 2(-7.27,2.71) 3(-7.27,-0.49) 4(-4.77,-0.49)
  round 4 hole 2.3: 5(-12.04,0) 6(0,0)
  silkscreen extent -12,-4.6 0,6.6

## Part data
C1 C5 C10 C12 C21A C21B C21C C21D C21E C21F C21G C21H C21I C21J C21K C21L: library part Cap, "Capacitor"
C2A C2B C2C C2D C2E C2F C2G C2H C2I C2J C2K C2L C3 C4 C6 C7 C8 C9 C11 C14: "Capacitor"
C13 C15 C18 C19: library part "Cap SMD", "Capacitor"
C16 C17: library part "Cap Tant 16V", "outline 3.2mm x 1.6mm"
C22: library part "Cap Elec, 330 uF, 35V", "Radial Thru hole"
D1: library part Diode, "Default Diode"
D2 D3 D4 D5: library part "ESD Diode 3.3V Quad", "Quad ESD Diode 3.3V"
D6A D6B D6C D6D D6E D6F D6G D6H D6I D6J D6K D6L: library part "DIODE, PAIR, COM CATHODE", "DIODE, PAIR, COM CATHODE"
J1A J1B J1C J1D J1E J1F J1G J1H J1I J1J J1K J1L: "SAMTEC, SIGNAL(12)+PWR(4), VERT"
J2: library part "Header 7X2", "Header, 7-Pin, Dual row"
J3: library part "CONN RJ-45 w/o magnetics", "Vertical PC mount, w/o magnetics"
J4: library part "Header 6", "Header, 6-Pin"
J5: library part "CONN 4 pin 3mm", "Molex Micro Fit 3, Vert PC mount"
K1A K1B K1C K1D K1E K1F K1G K1H K1I K1J K1K K1L: library part "Relay SPDT, 16A", "Tyco/Schrack RT314F24, Dual Latching"
L1: library part "Ethernet Magnetics module", "10/100BT Magnetics Module"
L2: library part "Inductor SMD 10uH 1.8A", "Inductor"
P1 P4: "Header, 2-Pin"
P2: library part "Header 4 PWR", "Header, 4-Pin"
P3: library part COAX-M, "RF Coaxial PCB Connector, MMCX; Thru-Hole, Vertical Mount Plug,  50 Ohm Impedance"
Q1A Q1B Q1C Q1D Q1E Q1F Q1G Q1H Q1I Q1J Q1K Q1L Q2A Q2B Q2C Q2D Q2E Q2F Q2G Q2H Q2I Q2J Q2K Q2L: library part MOSFET-N, "N-Channel MOSFET"
Q3: "P-MOSFET LOGIC LEVEL"
R1 R2 R3 R4A R4B R4C R4D R4E R4F R4G R4H R4I R4J R4K R4L R6 R7 R8 R9 R10 R11 R12 R13 R14 R15 R16 R17 R18A R18B R18C R18D R18E R18F R18G R18H R18I R18J R18K R18L R29 R30 R31 R32 R33 R34: library part "Res SMD", "Resistor 0805"
R5: library part Res3, "Resistor"
RN1 RN2 RN3: "Resistor Array 4 Isolated"
S1 S2: library part SW-PB, "Switch"
S3: library part SW_SPDT_DOUG
TP1 TP2 TP3 TP6 TP7 TP8 TP10A TP10B TP10C TP10D TP10E TP10F TP10G TP10H TP10I TP10J TP10K TP10L TP11A TP11B TP11C TP11D TP11E TP11F TP11G TP11H TP11I TP11J TP11K TP11L: "Test Point"
TP4 TP5 TP9 TP12 TP13 TP17 TP27 TP28 TP29: "SMD loop test point"
U1: "Timer"
U2: "32 Kbit Serial I²C Bus EEPROM"
U3: "Silicon Serial Number"
U4A U4B U4C U4D U4E U4F U4G U4H U4I U4J U4K U4L: library part INA195, "Current Shunt Monitor"
U6: "Low Noise BJT input opamp"
U7: "MC78M12"
U20: "MC78M05"
U21: "1A uPwr Step-Down switching regulator"
U22: "IC VOLT CONV SW-CAP W/SHTDN8SOIC"

## Free pads (board coordinates)
  round 216.54 hole 127.95: 0(700,169.29) 0(2100,169.29) 0(3500,169.29) 0(4900,169.29) 0(6300,169.29) 0(7700,169.29) 2(1300,4762.6) 2(2500,4762.6) 2(3500,4762.6) 2(4700,4762.6) 2(5700,4762.6) 2(6700,4762.6) 2(7900,4762.6) 3(1300,5420.08) 3(2700,5420.08) 3(4100,5420.08) 3(5500,5420.08) 3(6900,5420.08) 3(7900,5420.08) 4(700,10013.78) 4(2100,10013.78) 4(3500,10013.78) 4(4900,10013.78) 4(6300,10013.78) 4(7700,10013.78)
  round 200 hole 127.95: 2(100,4762.6) 3(100,5420.08)

## Via types
v1: diameter 20, hole 10, Top Layer (*.GTL) to Bottom Layer (*.GBL), 422 vias
v2: diameter 24, hole 10, Top Layer (*.GTL) to Bottom Layer (*.GBL), 28 vias
v3: diameter 50, hole 28, Top Layer (*.GTL) to Bottom Layer (*.GBL), 26 vias
v4: diameter 32, hole 20, Top Layer (*.GTL) to Bottom Layer (*.GBL), 10 vias
v5: diameter 25.98, hole 12.99, Top Layer (*.GTL) to Bottom Layer (*.GBL), tented top, 2 vias
v6: diameter 50, hole 25, Top Layer (*.GTL) to Bottom Layer (*.GBL), 2 vias